# EAGLE board SparkFun_9DoF_ISM330DHCX-MMC5983MA-Panel (EAGLE 9.6.2), part 1 of 5
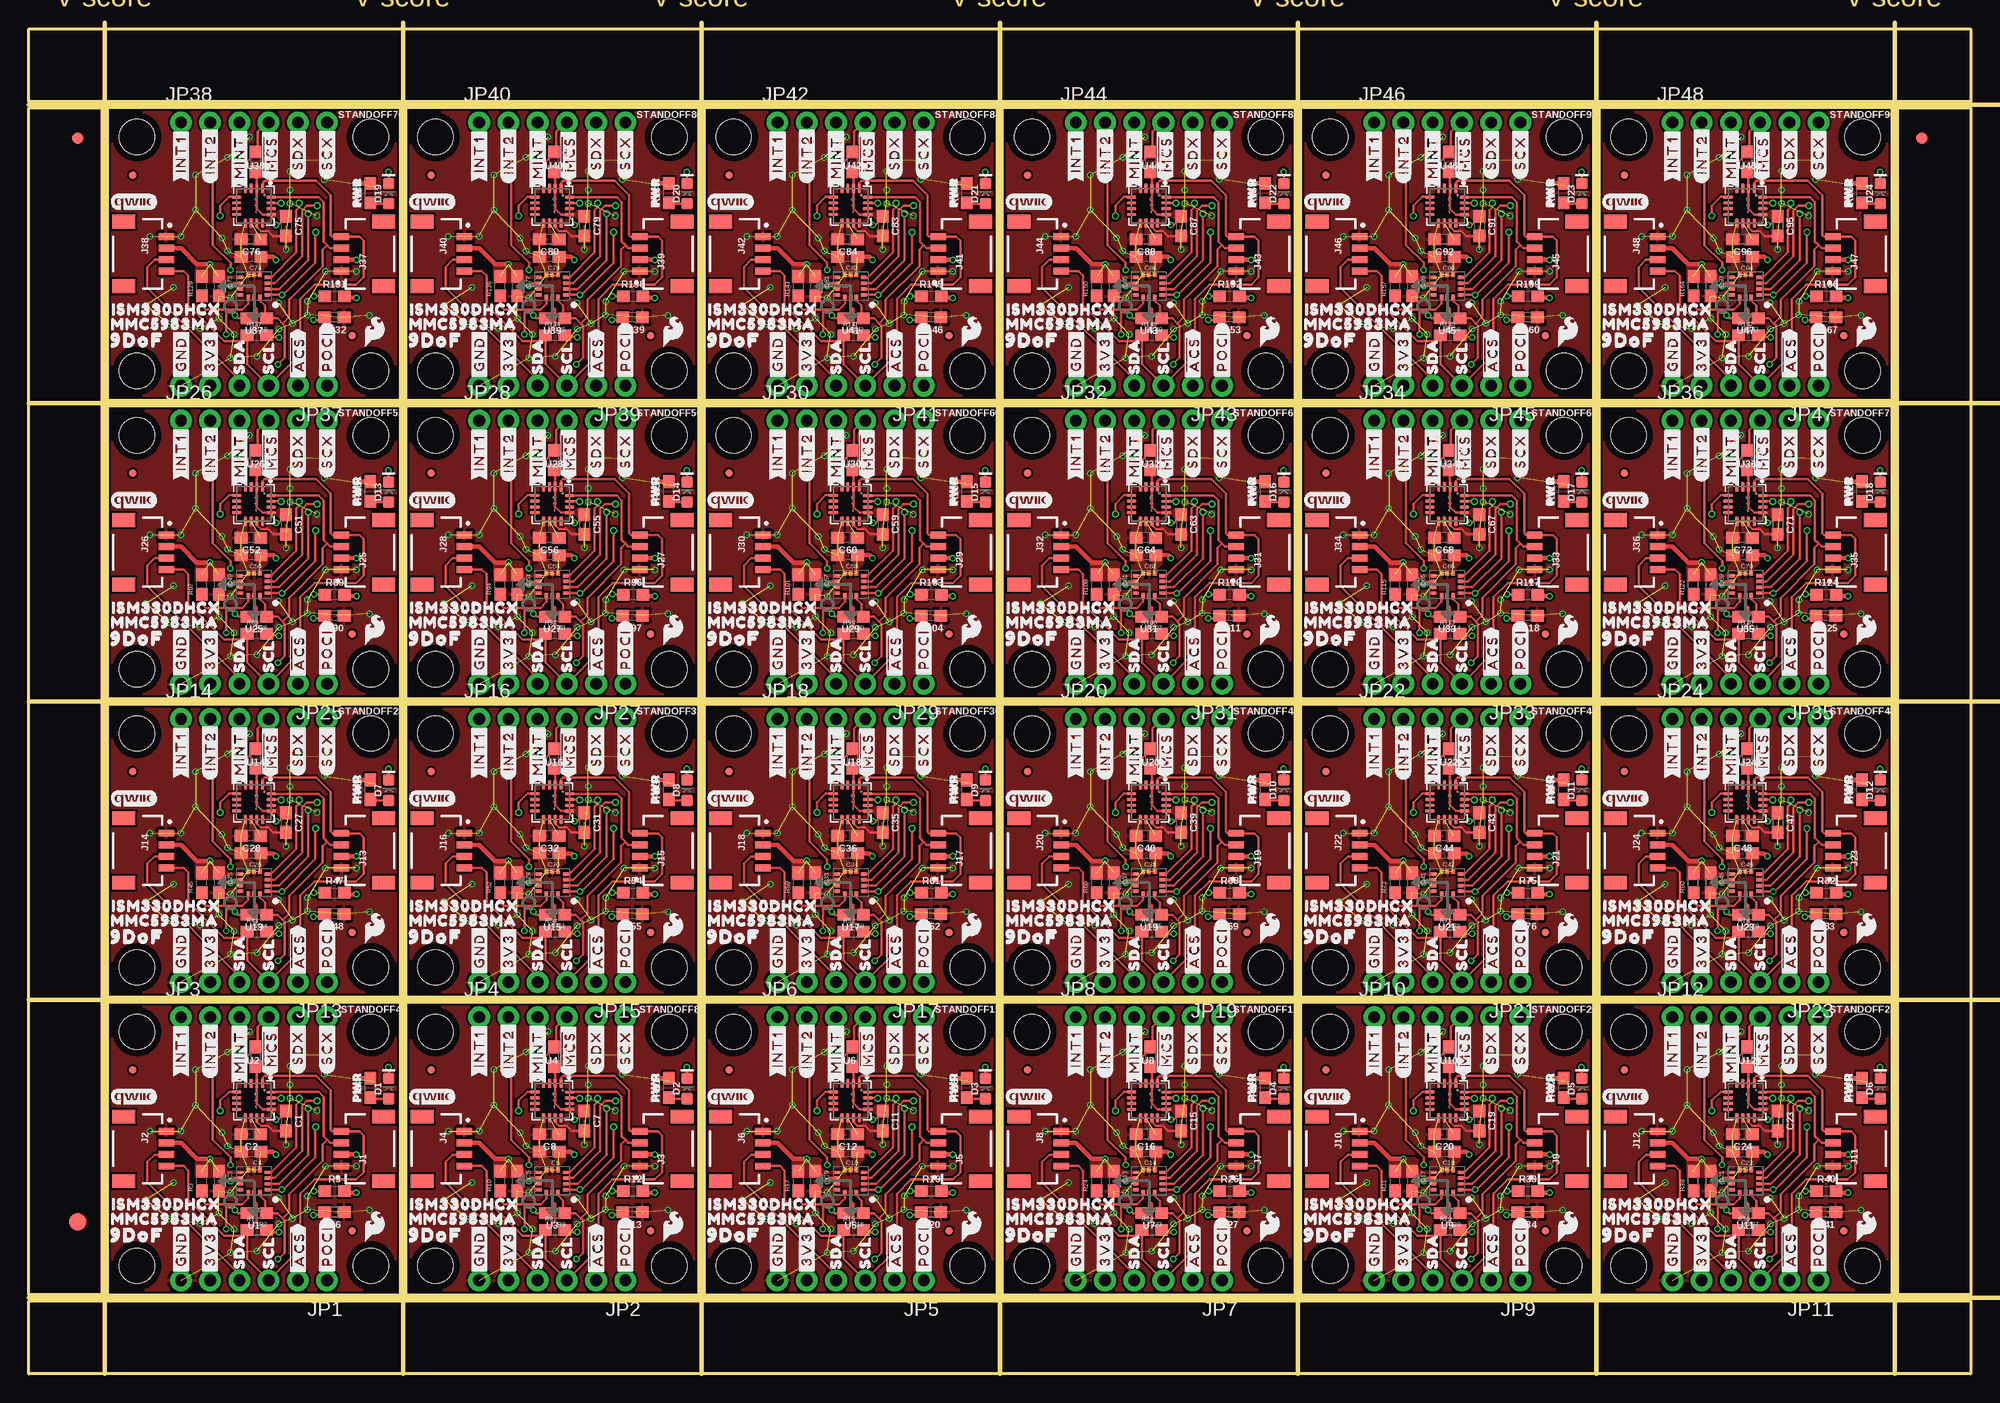
[diagram p0: board, top side]
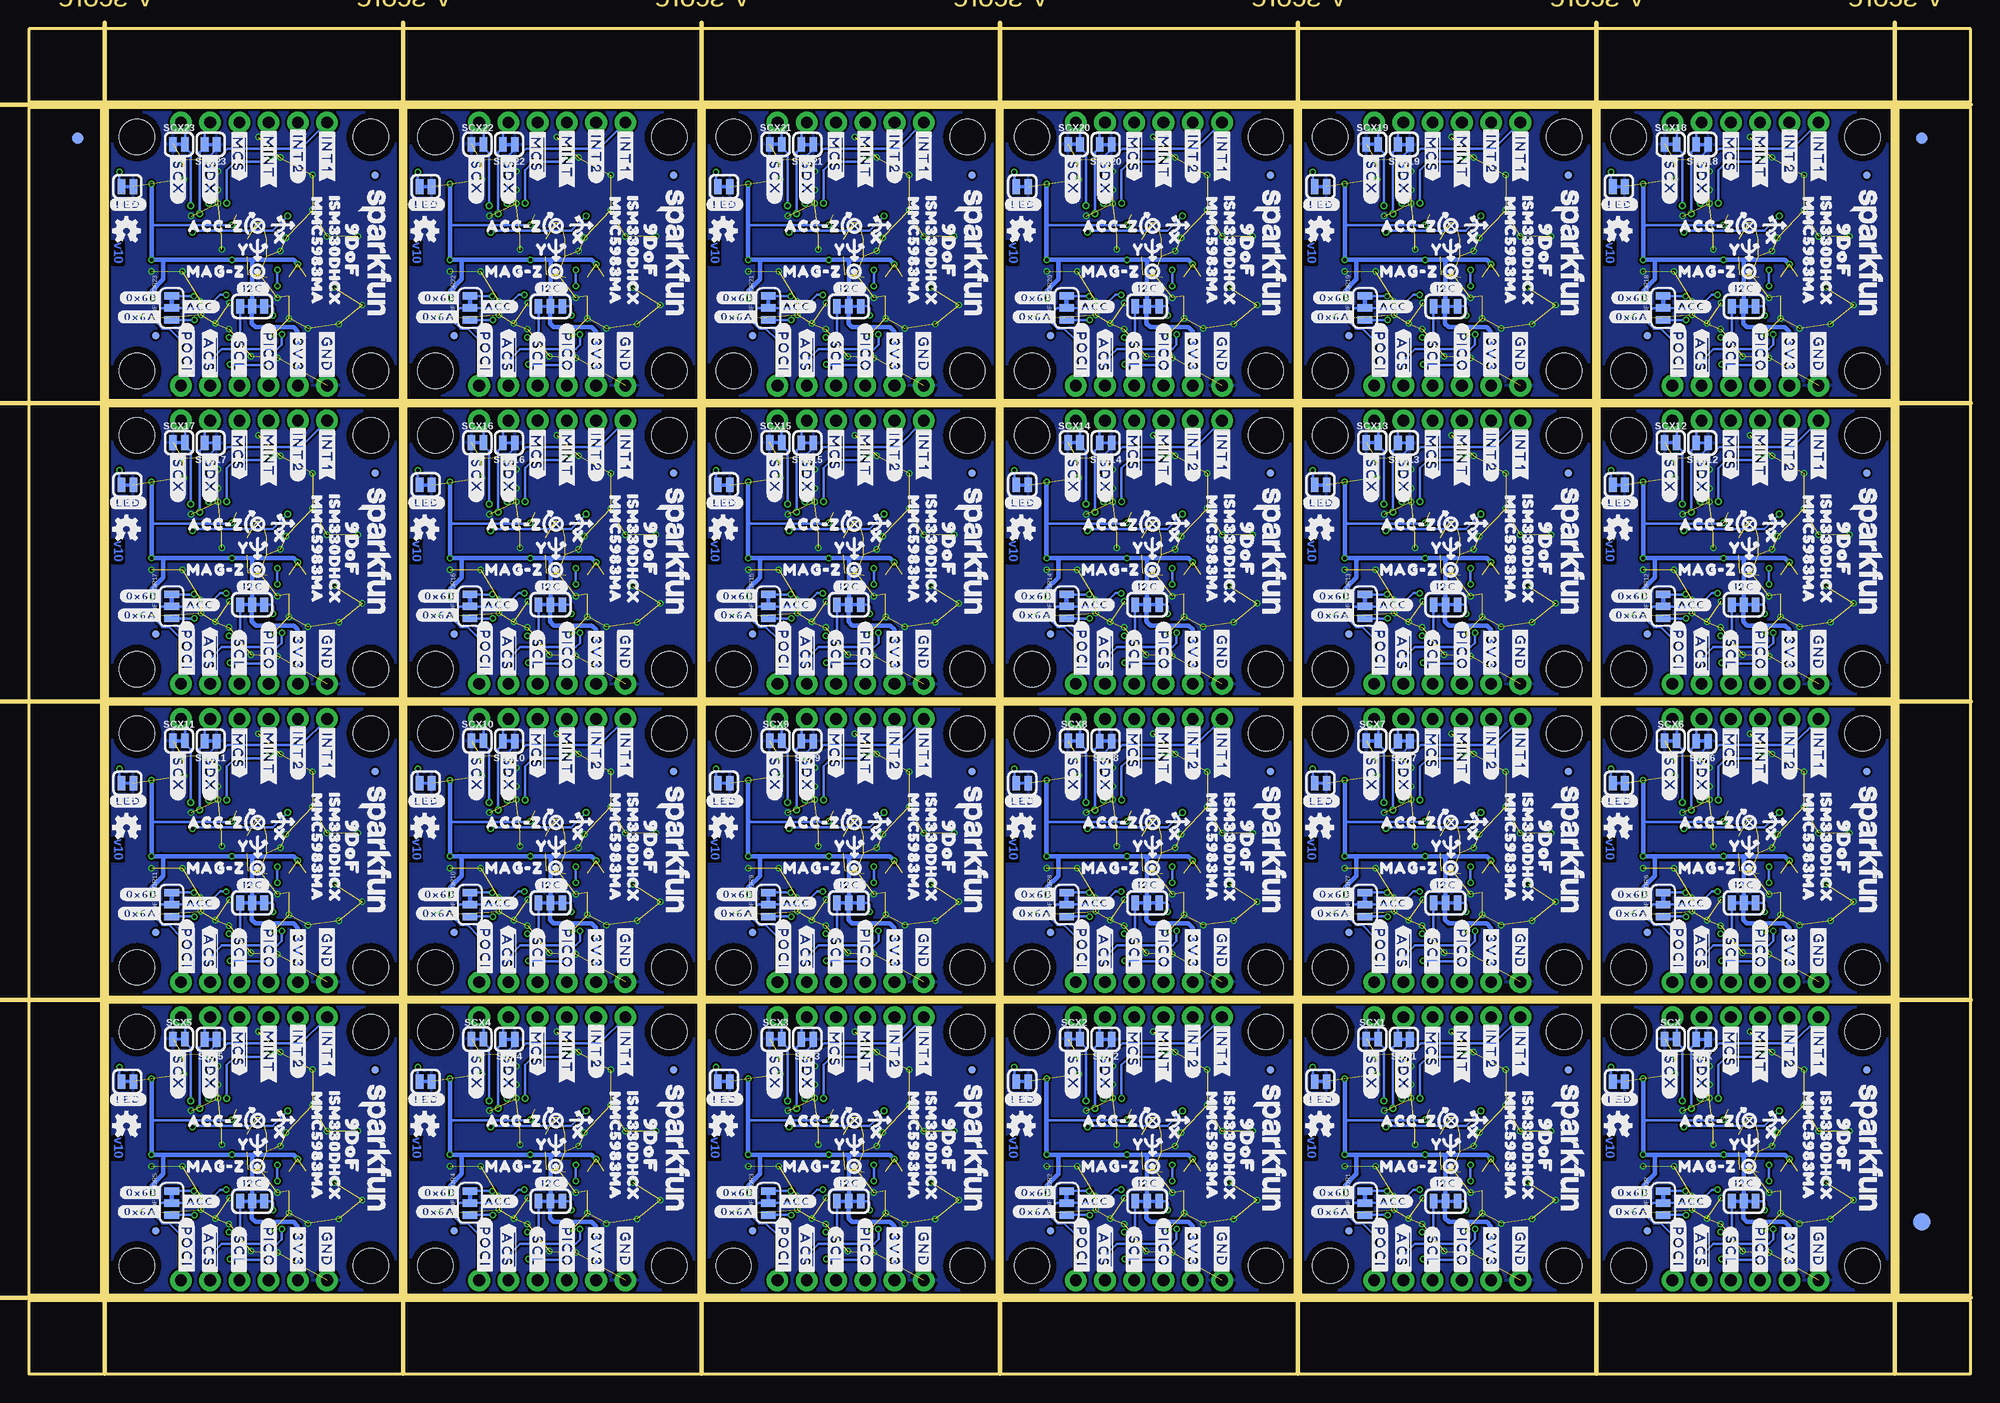
[diagram p1: board, bottom side, seen from below]

Size 168.66 x 116.84 mm. Coordinates in mm from the lower left corner, seen from the top.
Outline: 112 segments
Copper layers (1*16): Top 0.035mm / dielectric 1.5mm / Bottom 0.035mm
Design rules "SparkFun_9DoF_ISM330DHCX-MMC5983MA": minimum track width 5mil, minimum drill 0.3mm, track to track 5mil, track to pad 5mil, pad to pad 5mil, via to via 5mil, smd to smd 5mil, copper to edge 7mil, drill to drill 7mil, minimum pad ring 5mil, minimum via ring 5mil, stop-mask expansion 2.5mil, vias tented up to drill 25mil, thermal gap 10mil
tRestrict: area 19.3,17.4 to 19.4,17.7; area 19.6,22.9 to 19.9,22.9; area 18.6,22.9 to 18.9,22.9; area 18.6,22.9 to 18.9,22.9; area 18.2,22.4 to 18.5,22.5; area 45.2,17.4 to 45.3,17.7; area 45.5,22.9 to 45.8,22.9; area 44.5,22.9 to 44.8,22.9; area 44.5,22.9 to 44.8,22.9; area 44.1,22.4 to 44.4,22.5; area 71.1,17.4 to 71.2,17.7; area 71.5,22.9 to 71.8,22.9; 108 more areas
Milling: 12 lines

## Footprints (pad centres in the part's own frame; a part is rotated, then mirrored left to right if it is on the bottom)
SMT-JUMPER_3_1-NC_TRACE_SILK = smd 0.66 x 1.27: 1 -1.041,0; 2 0,0; 3 1.041,0
0603 = smd 1.1 x 1: 1 -0.85,0; 2 0.85,0
LED-0603 = smd 1 x 1: A -0.877,0; C 0.877,0
FIDUCIAL-1X2 = smd 1 x 1: 1 0,0
FIDUCIAL-1.5X3 = smd 1.5 x 1.5: 1 0,0
FIDUCIAL-MICRO = smd 0.635 x 0.635: 1 0,0
SMT-JUMPER_3_2-NC_TRACE_SILK = smd 0.66 x 1.27: 1 -1.041,0; 2 0,0; 3 1.041,0
JST04_1MM_RA = smd 0.6 x 1.35: 1 -1.5,0; 2 -0.5,0; 3 0.5,0; 4 1.5,0 | smd 1.2 x 2: NC1 2.8,-3.675; NC2 -2.8,-3.675
1X06_NO_SILK = drill 1.016 pad 1.88: 1 0,0; 2 2.54,0; 3 5.08,0; 4 7.62,0; 5 10.16,0; 6 12.7,0
SMT-JUMPER_2_NC_TRACE_SILK = smd 0.66 x 1.27: 1 -0.521,0; 2 0.521,0
STAND-OFF-TIGHT = hole 3.048: 0,0
LGA-14L = smd 0.48 x 0.3: P1 -1.163,0.75; P2 -1.163,0.25; P3 -1.163,-0.25; P4 -1.163,-0.75; P8 1.163,-0.75; P9 1.163,-0.25; P10 1.163,0.25; P11 1.163,0.75 | smd 0.3 x 0.48: P5 -0.5,-1; P6 0,-1; P7 0.5,-1; P12 0.5,1; P13 0,1; P14 -0.5,1
LGA-16-3X3MM-4X4PINS = smd 0.3 x 0.85: 1 0.754,1.498; 2 0.254,1.498; 3 -0.246,1.498; 4 -0.746,1.498; 9 -0.746,-1.506; 10 -0.246,-1.506; 11 0.254,-1.506; 12 0.754,-1.506 | smd 0.85 x 0.3: 5 -1.508,0.746; 6 -1.508,0.246; 7 -1.508,-0.254; 8 -1.508,-0.754; 13 1.496,-0.764; 14 1.496,-0.264; 15 1.496,0.236; 16 1.496,0.736

## Placement (x,y rotation side)
6DOF_ADDR  JUMPER-SMT_3_1-NC_TRACE_SILK  [SMT-JUMPER_3_1-NC_TRACE_SILK]  26.7,14.86 90 bottom
6DOF_ADDR1  JUMPER-SMT_3_1-NC_TRACE_SILK  [SMT-JUMPER_3_1-NC_TRACE_SILK]  52.61,14.86 90 bottom
6DOF_ADDR2  JUMPER-SMT_3_1-NC_TRACE_SILK  [SMT-JUMPER_3_1-NC_TRACE_SILK]  78.52,14.86 90 bottom
6DOF_ADDR3  JUMPER-SMT_3_1-NC_TRACE_SILK  [SMT-JUMPER_3_1-NC_TRACE_SILK]  104.43,14.86 90 bottom
6DOF_ADDR4  JUMPER-SMT_3_1-NC_TRACE_SILK  [SMT-JUMPER_3_1-NC_TRACE_SILK]  130.33,14.86 90 bottom
6DOF_ADDR5  JUMPER-SMT_3_1-NC_TRACE_SILK  [SMT-JUMPER_3_1-NC_TRACE_SILK]  156.24,14.86 90 bottom
6DOF_ADDR6  JUMPER-SMT_3_1-NC_TRACE_SILK  [SMT-JUMPER_3_1-NC_TRACE_SILK]  26.7,40.77 90 bottom
6DOF_ADDR7  JUMPER-SMT_3_1-NC_TRACE_SILK  [SMT-JUMPER_3_1-NC_TRACE_SILK]  52.61,40.77 90 bottom
6DOF_ADDR8  JUMPER-SMT_3_1-NC_TRACE_SILK  [SMT-JUMPER_3_1-NC_TRACE_SILK]  78.52,40.77 90 bottom
6DOF_ADDR9  JUMPER-SMT_3_1-NC_TRACE_SILK  [SMT-JUMPER_3_1-NC_TRACE_SILK]  104.43,40.77 90 bottom
6DOF_ADDR10  JUMPER-SMT_3_1-NC_TRACE_SILK  [SMT-JUMPER_3_1-NC_TRACE_SILK]  130.33,40.77 90 bottom
6DOF_ADDR11  JUMPER-SMT_3_1-NC_TRACE_SILK  [SMT-JUMPER_3_1-NC_TRACE_SILK]  156.24,40.77 90 bottom
6DOF_ADDR12  JUMPER-SMT_3_1-NC_TRACE_SILK  [SMT-JUMPER_3_1-NC_TRACE_SILK]  26.7,66.67 90 bottom
6DOF_ADDR13  JUMPER-SMT_3_1-NC_TRACE_SILK  [SMT-JUMPER_3_1-NC_TRACE_SILK]  52.61,66.67 90 bottom
6DOF_ADDR14  JUMPER-SMT_3_1-NC_TRACE_SILK  [SMT-JUMPER_3_1-NC_TRACE_SILK]  78.52,66.67 90 bottom
6DOF_ADDR15  JUMPER-SMT_3_1-NC_TRACE_SILK  [SMT-JUMPER_3_1-NC_TRACE_SILK]  104.43,66.67 90 bottom
6DOF_ADDR16  JUMPER-SMT_3_1-NC_TRACE_SILK  [SMT-JUMPER_3_1-NC_TRACE_SILK]  130.33,66.67 90 bottom
6DOF_ADDR17  JUMPER-SMT_3_1-NC_TRACE_SILK  [SMT-JUMPER_3_1-NC_TRACE_SILK]  156.24,66.67 90 bottom
6DOF_ADDR18  JUMPER-SMT_3_1-NC_TRACE_SILK  [SMT-JUMPER_3_1-NC_TRACE_SILK]  26.7,92.58 90 bottom
6DOF_ADDR19  JUMPER-SMT_3_1-NC_TRACE_SILK  [SMT-JUMPER_3_1-NC_TRACE_SILK]  52.61,92.58 90 bottom
6DOF_ADDR20  JUMPER-SMT_3_1-NC_TRACE_SILK  [SMT-JUMPER_3_1-NC_TRACE_SILK]  78.52,92.58 90 bottom
6DOF_ADDR21  JUMPER-SMT_3_1-NC_TRACE_SILK  [SMT-JUMPER_3_1-NC_TRACE_SILK]  104.43,92.58 90 bottom
6DOF_ADDR22  JUMPER-SMT_3_1-NC_TRACE_SILK  [SMT-JUMPER_3_1-NC_TRACE_SILK]  130.33,92.58 90 bottom
6DOF_ADDR23  JUMPER-SMT_3_1-NC_TRACE_SILK  [SMT-JUMPER_3_1-NC_TRACE_SILK]  156.24,92.58 90 bottom
C1  1.0uF  [0603]  22.35,21.97 270 top
C2  10uF  [0603]  19.3,20.83 180 top
C3  0.1uF  [0603]  16.51,16.76 270 top
C4  0.1uF  [0603]  19.3,19.3 180 top
C5  0.1uF  [0603]  42.42,16.76 270 top
C6  0.1uF  [0603]  45.21,19.3 180 top
C7  1.0uF  [0603]  48.26,21.97 270 top
C8  10uF  [0603]  45.21,20.83 180 top
C9  0.1uF  [0603]  68.33,16.76 270 top
C10  0.1uF  [0603]  71.12,19.3 180 top
C11  1.0uF  [0603]  74.17,21.97 270 top
C12  10uF  [0603]  71.12,20.83 180 top
C13  0.1uF  [0603]  94.23,16.76 270 top
C14  0.1uF  [0603]  97.03,19.3 180 top
C15  1.0uF  [0603]  100.08,21.97 270 top
C16  10uF  [0603]  97.03,20.83 180 top
C17  0.1uF  [0603]  120.14,16.76 270 top
C18  0.1uF  [0603]  122.94,19.3 180 top
C19  1.0uF  [0603]  125.98,21.97 270 top
C20  10uF  [0603]  122.94,20.83 180 top
C21  0.1uF  [0603]  146.05,16.76 270 top
C22  0.1uF  [0603]  148.84,19.3 180 top
C23  1.0uF  [0603]  151.89,21.97 270 top
C24  10uF  [0603]  148.84,20.83 180 top
C25  0.1uF  [0603]  16.51,42.67 270 top
C26  0.1uF  [0603]  19.3,45.21 180 top
C27  1.0uF  [0603]  22.35,47.88 270 top
C28  10uF  [0603]  19.3,46.74 180 top
C29  0.1uF  [0603]  42.42,42.67 270 top
C30  0.1uF  [0603]  45.21,45.21 180 top
C31  1.0uF  [0603]  48.26,47.88 270 top
C32  10uF  [0603]  45.21,46.74 180 top
C33  0.1uF  [0603]  68.33,42.67 270 top
C34  0.1uF  [0603]  71.12,45.21 180 top
C35  1.0uF  [0603]  74.17,47.88 270 top
C36  10uF  [0603]  71.12,46.74 180 top
C37  0.1uF  [0603]  94.23,42.67 270 top
C38  0.1uF  [0603]  97.03,45.21 180 top
C39  1.0uF  [0603]  100.08,47.88 270 top
C40  10uF  [0603]  97.03,46.74 180 top
C41  0.1uF  [0603]  120.14,42.67 270 top
C42  0.1uF  [0603]  122.94,45.21 180 top
C43  1.0uF  [0603]  125.98,47.88 270 top
C44  10uF  [0603]  122.94,46.74 180 top
C45  0.1uF  [0603]  146.05,42.67 270 top
C46  0.1uF  [0603]  148.84,45.21 180 top
C47  1.0uF  [0603]  151.89,47.88 270 top
C48  10uF  [0603]  148.84,46.74 180 top
C49  0.1uF  [0603]  16.51,68.57 270 top
C50  0.1uF  [0603]  19.3,71.12 180 top
C51  1.0uF  [0603]  22.35,73.79 270 top
C52  10uF  [0603]  19.3,72.64 180 top
C53  0.1uF  [0603]  42.42,68.57 270 top
C54  0.1uF  [0603]  45.21,71.12 180 top
C55  1.0uF  [0603]  48.26,73.79 270 top
C56  10uF  [0603]  45.21,72.64 180 top
C57  0.1uF  [0603]  68.33,68.57 270 top
C58  0.1uF  [0603]  71.12,71.12 180 top
C59  1.0uF  [0603]  74.17,73.79 270 top
C60  10uF  [0603]  71.12,72.64 180 top
C61  0.1uF  [0603]  94.23,68.57 270 top
C62  0.1uF  [0603]  97.03,71.12 180 top
C63  1.0uF  [0603]  100.08,73.79 270 top
C64  10uF  [0603]  97.03,72.64 180 top
C65  0.1uF  [0603]  120.14,68.57 270 top
C66  0.1uF  [0603]  122.94,71.12 180 top
C67  1.0uF  [0603]  125.98,73.79 270 top
C68  10uF  [0603]  122.94,72.64 180 top
C69  0.1uF  [0603]  146.05,68.57 270 top
C70  0.1uF  [0603]  148.84,71.12 180 top
C71  1.0uF  [0603]  151.89,73.79 270 top
C72  10uF  [0603]  148.84,72.64 180 top
C73  0.1uF  [0603]  16.51,94.48 270 top
C74  0.1uF  [0603]  19.3,97.03 180 top
C75  1.0uF  [0603]  22.35,99.7 270 top
C76  10uF  [0603]  19.3,98.55 180 top
C77  0.1uF  [0603]  42.42,94.48 270 top
C78  0.1uF  [0603]  45.21,97.03 180 top
C79  1.0uF  [0603]  48.26,99.7 270 top
C80  10uF  [0603]  45.21,98.55 180 top
C81  0.1uF  [0603]  68.33,94.48 270 top
C82  0.1uF  [0603]  71.12,97.03 180 top
C83  1.0uF  [0603]  74.17,99.7 270 top
C84  10uF  [0603]  71.12,98.55 180 top
C85  0.1uF  [0603]  94.23,94.48 270 top
C86  0.1uF  [0603]  97.03,97.03 180 top
C87  1.0uF  [0603]  100.08,99.7 270 top
C88  10uF  [0603]  97.03,98.55 180 top
C89  0.1uF  [0603]  120.14,94.48 270 top
C90  0.1uF  [0603]  122.94,97.03 180 top
C91  1.0uF  [0603]  125.98,99.7 270 top
C92  10uF  [0603]  122.94,98.55 180 top
C93  0.1uF  [0603]  146.05,94.48 270 top
C94  0.1uF  [0603]  148.84,97.03 180 top
C95  1.0uF  [0603]  151.89,99.7 270 top
C96  10uF  [0603]  148.84,98.55 180 top
D1  RED  [LED-0603]  31.27,24.79 90 top
D2  RED  [LED-0603]  57.18,24.79 90 top
D3  RED  [LED-0603]  83.08,24.79 90 top
D4  RED  [LED-0603]  108.99,24.79 90 top
D5  RED  [LED-0603]  134.9,24.79 90 top
D6  RED  [LED-0603]  160.81,24.79 90 top
D7  RED  [LED-0603]  31.27,50.7 90 top
D8  RED  [LED-0603]  57.18,50.7 90 top
D9  RED  [LED-0603]  83.08,50.7 90 top
D10  RED  [LED-0603]  108.99,50.7 90 top
D11  RED  [LED-0603]  134.9,50.7 90 top
D12  RED  [LED-0603]  160.81,50.7 90 top
D13  RED  [LED-0603]  31.27,76.61 90 top
D14  RED  [LED-0603]  57.18,76.61 90 top
D15  RED  [LED-0603]  83.08,76.61 90 top
D16  RED  [LED-0603]  108.99,76.61 90 top
D17  RED  [LED-0603]  134.9,76.61 90 top
D18  RED  [LED-0603]  160.81,76.61 90 top
D19  RED  [LED-0603]  31.27,102.51 90 top
D20  RED  [LED-0603]  57.18,102.51 90 top
D21  RED  [LED-0603]  83.08,102.51 90 top
D22  RED  [LED-0603]  108.99,102.51 90 top
D23  RED  [LED-0603]  134.9,102.51 90 top
D24  RED  [LED-0603]  160.81,102.51 90 top
E$1  [FIDUCIAL-1X2]  4.23,107.31 0 top
E$2  [FIDUCIAL-1X2]  4.23,107.31 0 bottom
E$3  [FIDUCIAL-1X2]  164.42,107.31 0 top
E$4  [FIDUCIAL-1X2]  164.42,107.31 0 bottom
E$5  [FIDUCIAL-1.5X3]  4.23,13.21 0 top
E$6  [FIDUCIAL-1.5X3]  4.23,13.21 0 bottom
FD1  FIDUCIALUFIDUCIAL  [FIDUCIAL-MICRO]  9.02,26.42 0 bottom
FD2  FIDUCIALUFIDUCIAL  [FIDUCIAL-MICRO]  28.09,12.45 0 bottom
FD3  FIDUCIALUFIDUCIAL  [FIDUCIAL-MICRO]  34.92,26.42 0 bottom
FD4  FIDUCIALUFIDUCIAL  [FIDUCIAL-MICRO]  54,12.45 0 bottom
FD5  FIDUCIALUFIDUCIAL  [FIDUCIAL-MICRO]  60.83,26.42 0 bottom
FD6  FIDUCIALUFIDUCIAL  [FIDUCIAL-MICRO]  79.91,12.45 0 bottom
FD7  FIDUCIALUFIDUCIAL  [FIDUCIAL-MICRO]  86.74,26.42 0 bottom
FD8  FIDUCIALUFIDUCIAL  [FIDUCIAL-MICRO]  105.82,12.45 0 bottom
FD9  FIDUCIALUFIDUCIAL  [FIDUCIAL-MICRO]  112.65,26.42 0 bottom
FD10  FIDUCIALUFIDUCIAL  [FIDUCIAL-MICRO]  131.72,12.45 0 bottom
FD11  FIDUCIALUFIDUCIAL  [FIDUCIAL-MICRO]  138.56,26.42 0 bottom
FD12  FIDUCIALUFIDUCIAL  [FIDUCIAL-MICRO]  157.63,12.45 0 bottom
FD13  FIDUCIALUFIDUCIAL  [FIDUCIAL-MICRO]  9.02,52.32 0 bottom
FD14  FIDUCIALUFIDUCIAL  [FIDUCIAL-MICRO]  28.09,38.35 0 bottom
FD15  FIDUCIALUFIDUCIAL  [FIDUCIAL-MICRO]  34.92,52.32 0 bottom
FD16  FIDUCIALUFIDUCIAL  [FIDUCIAL-MICRO]  54,38.35 0 bottom
FD17  FIDUCIALUFIDUCIAL  [FIDUCIAL-MICRO]  60.83,52.32 0 bottom
FD18  FIDUCIALUFIDUCIAL  [FIDUCIAL-MICRO]  79.91,38.35 0 bottom
FD19  FIDUCIALUFIDUCIAL  [FIDUCIAL-MICRO]  86.74,52.32 0 bottom
FD20  FIDUCIALUFIDUCIAL  [FIDUCIAL-MICRO]  105.82,38.35 0 bottom
FD21  FIDUCIALUFIDUCIAL  [FIDUCIAL-MICRO]  112.65,52.32 0 bottom
FD22  FIDUCIALUFIDUCIAL  [FIDUCIAL-MICRO]  131.72,38.35 0 bottom
FD23  FIDUCIALUFIDUCIAL  [FIDUCIAL-MICRO]  138.56,52.32 0 bottom
FD24  FIDUCIALUFIDUCIAL  [FIDUCIAL-MICRO]  157.63,38.35 0 bottom
FD25  FIDUCIALUFIDUCIAL  [FIDUCIAL-MICRO]  9.02,78.23 0 bottom
FD26  FIDUCIALUFIDUCIAL  [FIDUCIAL-MICRO]  28.09,64.26 0 bottom
FD27  FIDUCIALUFIDUCIAL  [FIDUCIAL-MICRO]  34.92,78.23 0 bottom
FD28  FIDUCIALUFIDUCIAL  [FIDUCIAL-MICRO]  54,64.26 0 bottom
FD29  FIDUCIALUFIDUCIAL  [FIDUCIAL-MICRO]  60.83,78.23 0 bottom
FD30  FIDUCIALUFIDUCIAL  [FIDUCIAL-MICRO]  79.91,64.26 0 bottom
FD31  FIDUCIALUFIDUCIAL  [FIDUCIAL-MICRO]  86.74,78.23 0 bottom
FD32  FIDUCIALUFIDUCIAL  [FIDUCIAL-MICRO]  105.82,64.26 0 bottom
FD33  FIDUCIALUFIDUCIAL  [FIDUCIAL-MICRO]  112.65,78.23 0 bottom
FD34  FIDUCIALUFIDUCIAL  [FIDUCIAL-MICRO]  131.72,64.26 0 bottom
FD35  FIDUCIALUFIDUCIAL  [FIDUCIAL-MICRO]  138.56,78.23 0 bottom
FD36  FIDUCIALUFIDUCIAL  [FIDUCIAL-MICRO]  157.63,64.26 0 bottom
FD37  FIDUCIALUFIDUCIAL  [FIDUCIAL-MICRO]  9.02,104.14 0 bottom
FD38  FIDUCIALUFIDUCIAL  [FIDUCIAL-MICRO]  28.09,90.17 0 bottom
FD39  FIDUCIALUFIDUCIAL  [FIDUCIAL-MICRO]  34.92,104.14 0 bottom
FD40  FIDUCIALUFIDUCIAL  [FIDUCIAL-MICRO]  54,90.17 0 bottom
FD41  FIDUCIALUFIDUCIAL  [FIDUCIAL-MICRO]  60.83,104.14 0 bottom
FD42  FIDUCIALUFIDUCIAL  [FIDUCIAL-MICRO]  79.91,90.17 0 bottom
FD43  FIDUCIALUFIDUCIAL  [FIDUCIAL-MICRO]  86.74,104.14 0 bottom
FD44  FIDUCIALUFIDUCIAL  [FIDUCIAL-MICRO]  105.82,90.17 0 bottom
FD45  FIDUCIALUFIDUCIAL  [FIDUCIAL-MICRO]  112.65,104.14 0 bottom
FD46  FIDUCIALUFIDUCIAL  [FIDUCIAL-MICRO]  131.72,90.17 0 bottom
FD47  FIDUCIALUFIDUCIAL  [FIDUCIAL-MICRO]  138.56,104.14 0 bottom
FD48  FIDUCIALUFIDUCIAL  [FIDUCIAL-MICRO]  157.63,90.17 0 bottom
FID1  FIDUCIALUFIDUCIAL  [FIDUCIAL-MICRO]  9.02,26.42 0 top
FID2  FIDUCIALUFIDUCIAL  [FIDUCIAL-MICRO]  28.09,12.45 0 top
FID3  FIDUCIALUFIDUCIAL  [FIDUCIAL-MICRO]  34.92,26.42 0 top
FID4  FIDUCIALUFIDUCIAL  [FIDUCIAL-MICRO]  54,12.45 0 top
FID5  FIDUCIALUFIDUCIAL  [FIDUCIAL-MICRO]  60.83,26.42 0 top
FID6  FIDUCIALUFIDUCIAL  [FIDUCIAL-MICRO]  79.91,12.45 0 top
FID7  FIDUCIALUFIDUCIAL  [FIDUCIAL-MICRO]  86.74,26.42 0 top
FID8  FIDUCIALUFIDUCIAL  [FIDUCIAL-MICRO]  105.82,12.45 0 top
FID9  FIDUCIALUFIDUCIAL  [FIDUCIAL-MICRO]  112.65,26.42 0 top
FID10  FIDUCIALUFIDUCIAL  [FIDUCIAL-MICRO]  131.72,12.45 0 top
FID11  FIDUCIALUFIDUCIAL  [FIDUCIAL-MICRO]  138.56,26.42 0 top
FID12  FIDUCIALUFIDUCIAL  [FIDUCIAL-MICRO]  157.63,12.45 0 top
FID13  FIDUCIALUFIDUCIAL  [FIDUCIAL-MICRO]  9.02,52.32 0 top
FID14  FIDUCIALUFIDUCIAL  [FIDUCIAL-MICRO]  28.09,38.35 0 top
FID15  FIDUCIALUFIDUCIAL  [FIDUCIAL-MICRO]  34.92,52.32 0 top
FID16  FIDUCIALUFIDUCIAL  [FIDUCIAL-MICRO]  54,38.35 0 top
FID17  FIDUCIALUFIDUCIAL  [FIDUCIAL-MICRO]  60.83,52.32 0 top
FID18  FIDUCIALUFIDUCIAL  [FIDUCIAL-MICRO]  79.91,38.35 0 top
FID19  FIDUCIALUFIDUCIAL  [FIDUCIAL-MICRO]  86.74,52.32 0 top
FID20  FIDUCIALUFIDUCIAL  [FIDUCIAL-MICRO]  105.82,38.35 0 top
FID21  FIDUCIALUFIDUCIAL  [FIDUCIAL-MICRO]  112.65,52.32 0 top
FID22  FIDUCIALUFIDUCIAL  [FIDUCIAL-MICRO]  131.72,38.35 0 top
FID23  FIDUCIALUFIDUCIAL  [FIDUCIAL-MICRO]  138.56,52.32 0 top
FID24  FIDUCIALUFIDUCIAL  [FIDUCIAL-MICRO]  157.63,38.35 0 top
FID25  FIDUCIALUFIDUCIAL  [FIDUCIAL-MICRO]  9.02,78.23 0 top
FID26  FIDUCIALUFIDUCIAL  [FIDUCIAL-MICRO]  28.09,64.26 0 top
FID27  FIDUCIALUFIDUCIAL  [FIDUCIAL-MICRO]  34.92,78.23 0 top
FID28  FIDUCIALUFIDUCIAL  [FIDUCIAL-MICRO]  54,64.26 0 top
FID29  FIDUCIALUFIDUCIAL  [FIDUCIAL-MICRO]  60.83,78.23 0 top
FID30  FIDUCIALUFIDUCIAL  [FIDUCIAL-MICRO]  79.91,64.26 0 top
FID31  FIDUCIALUFIDUCIAL  [FIDUCIAL-MICRO]  86.74,78.23 0 top
FID32  FIDUCIALUFIDUCIAL  [FIDUCIAL-MICRO]  105.82,64.26 0 top
FID33  FIDUCIALUFIDUCIAL  [FIDUCIAL-MICRO]  112.65,78.23 0 top
FID34  FIDUCIALUFIDUCIAL  [FIDUCIAL-MICRO]  131.72,64.26 0 top
FID35  FIDUCIALUFIDUCIAL  [FIDUCIAL-MICRO]  138.56,78.23 0 top
FID36  FIDUCIALUFIDUCIAL  [FIDUCIAL-MICRO]  157.63,64.26 0 top
FID37  FIDUCIALUFIDUCIAL  [FIDUCIAL-MICRO]  9.02,104.14 0 top
FID38  FIDUCIALUFIDUCIAL  [FIDUCIAL-MICRO]  28.09,90.17 0 top
FID39  FIDUCIALUFIDUCIAL  [FIDUCIAL-MICRO]  34.92,104.14 0 top
FID40  FIDUCIALUFIDUCIAL  [FIDUCIAL-MICRO]  54,90.17 0 top
FID41  FIDUCIALUFIDUCIAL  [FIDUCIAL-MICRO]  60.83,104.14 0 top
FID42  FIDUCIALUFIDUCIAL  [FIDUCIAL-MICRO]  79.91,90.17 0 top
FID43  FIDUCIALUFIDUCIAL  [FIDUCIAL-MICRO]  86.74,104.14 0 top
FID44  FIDUCIALUFIDUCIAL  [FIDUCIAL-MICRO]  105.82,90.17 0 top
FID45  FIDUCIALUFIDUCIAL  [FIDUCIAL-MICRO]  112.65,104.14 0 top
FID46  FIDUCIALUFIDUCIAL  [FIDUCIAL-MICRO]  131.72,90.17 0 top
FID47  FIDUCIALUFIDUCIAL  [FIDUCIAL-MICRO]  138.56,104.14 0 top
FID48  FIDUCIALUFIDUCIAL  [FIDUCIAL-MICRO]  157.63,90.17 0 top
I2C_PU  S_MODE  [SMT-JUMPER_3_2-NC_TRACE_SILK]  19.71,15.01 0 bottom
I2C_PU1  S_MODE  [SMT-JUMPER_3_2-NC_TRACE_SILK]  45.62,15.01 0 bottom
I2C_PU2  S_MODE  [SMT-JUMPER_3_2-NC_TRACE_SILK]  71.53,15.01 0 bottom
I2C_PU3  S_MODE  [SMT-JUMPER_3_2-NC_TRACE_SILK]  97.43,15.01 0 bottom
I2C_PU4  S_MODE  [SMT-JUMPER_3_2-NC_TRACE_SILK]  123.34,15.01 0 bottom
I2C_PU5  S_MODE  [SMT-JUMPER_3_2-NC_TRACE_SILK]  149.25,15.01 0 bottom
I2C_PU6  S_MODE  [SMT-JUMPER_3_2-NC_TRACE_SILK]  19.71,40.91 0 bottom
I2C_PU7  S_MODE  [SMT-JUMPER_3_2-NC_TRACE_SILK]  45.62,40.91 0 bottom
I2C_PU8  S_MODE  [SMT-JUMPER_3_2-NC_TRACE_SILK]  71.53,40.91 0 bottom
I2C_PU9  S_MODE  [SMT-JUMPER_3_2-NC_TRACE_SILK]  97.43,40.91 0 bottom
I2C_PU10  S_MODE  [SMT-JUMPER_3_2-NC_TRACE_SILK]  123.34,40.91 0 bottom
I2C_PU11  S_MODE  [SMT-JUMPER_3_2-NC_TRACE_SILK]  149.25,40.91 0 bottom
I2C_PU12  S_MODE  [SMT-JUMPER_3_2-NC_TRACE_SILK]  19.71,66.82 0 bottom
I2C_PU13  S_MODE  [SMT-JUMPER_3_2-NC_TRACE_SILK]  45.62,66.82 0 bottom
I2C_PU14  S_MODE  [SMT-JUMPER_3_2-NC_TRACE_SILK]  71.53,66.82 0 bottom
I2C_PU15  S_MODE  [SMT-JUMPER_3_2-NC_TRACE_SILK]  97.43,66.82 0 bottom
I2C_PU16  S_MODE  [SMT-JUMPER_3_2-NC_TRACE_SILK]  123.34,66.82 0 bottom
I2C_PU17  S_MODE  [SMT-JUMPER_3_2-NC_TRACE_SILK]  149.25,66.82 0 bottom
I2C_PU18  S_MODE  [SMT-JUMPER_3_2-NC_TRACE_SILK]  19.71,92.73 0 bottom
I2C_PU19  S_MODE  [SMT-JUMPER_3_2-NC_TRACE_SILK]  45.62,92.73 0 bottom
I2C_PU20  S_MODE  [SMT-JUMPER_3_2-NC_TRACE_SILK]  71.53,92.73 0 bottom
I2C_PU21  S_MODE  [SMT-JUMPER_3_2-NC_TRACE_SILK]  97.43,92.73 0 bottom
I2C_PU22  S_MODE  [SMT-JUMPER_3_2-NC_TRACE_SILK]  123.34,92.73 0 bottom
I2C_PU23  S_MODE  [SMT-JUMPER_3_2-NC_TRACE_SILK]  149.25,92.73 0 bottom
J1  QWIIC_RIGHT_ANGLE  [JST04_1MM_RA]  27.15,19.56 90 top
J2  QWIIC_RIGHT_ANGLE  [JST04_1MM_RA]  11.94,19.56 270 top
J3  QWIIC_RIGHT_ANGLE  [JST04_1MM_RA]  53.06,19.56 90 top
J4  QWIIC_RIGHT_ANGLE  [JST04_1MM_RA]  37.85,19.56 270 top
J5  QWIIC_RIGHT_ANGLE  [JST04_1MM_RA]  78.97,19.56 90 top
J6  QWIIC_RIGHT_ANGLE  [JST04_1MM_RA]  63.75,19.56 270 top
J7  QWIIC_RIGHT_ANGLE  [JST04_1MM_RA]  104.88,19.56 90 top
J8  QWIIC_RIGHT_ANGLE  [JST04_1MM_RA]  89.66,19.56 270 top
J9  QWIIC_RIGHT_ANGLE  [JST04_1MM_RA]  130.78,19.56 90 top
J10  QWIIC_RIGHT_ANGLE  [JST04_1MM_RA]  115.57,19.56 270 top
J11  QWIIC_RIGHT_ANGLE  [JST04_1MM_RA]  156.69,19.56 90 top
J12  QWIIC_RIGHT_ANGLE  [JST04_1MM_RA]  141.48,19.56 270 top
J13  QWIIC_RIGHT_ANGLE  [JST04_1MM_RA]  27.15,45.47 90 top
J14  QWIIC_RIGHT_ANGLE  [JST04_1MM_RA]  11.94,45.47 270 top
J15  QWIIC_RIGHT_ANGLE  [JST04_1MM_RA]  53.06,45.47 90 top
J16  QWIIC_RIGHT_ANGLE  [JST04_1MM_RA]  37.85,45.47 270 top
J17  QWIIC_RIGHT_ANGLE  [JST04_1MM_RA]  78.97,45.47 90 top
J18  QWIIC_RIGHT_ANGLE  [JST04_1MM_RA]  63.75,45.47 270 top
J19  QWIIC_RIGHT_ANGLE  [JST04_1MM_RA]  104.88,45.47 90 top
J20  QWIIC_RIGHT_ANGLE  [JST04_1MM_RA]  89.66,45.47 270 top
J21  QWIIC_RIGHT_ANGLE  [JST04_1MM_RA]  130.78,45.47 90 top
J22  QWIIC_RIGHT_ANGLE  [JST04_1MM_RA]  115.57,45.47 270 top
J23  QWIIC_RIGHT_ANGLE  [JST04_1MM_RA]  156.69,45.47 90 top
J24  QWIIC_RIGHT_ANGLE  [JST04_1MM_RA]  141.48,45.47 270 top
J25  QWIIC_RIGHT_ANGLE  [JST04_1MM_RA]  27.15,71.37 90 top
J26  QWIIC_RIGHT_ANGLE  [JST04_1MM_RA]  11.94,71.37 270 top
J27  QWIIC_RIGHT_ANGLE  [JST04_1MM_RA]  53.06,71.37 90 top
J28  QWIIC_RIGHT_ANGLE  [JST04_1MM_RA]  37.85,71.37 270 top
J29  QWIIC_RIGHT_ANGLE  [JST04_1MM_RA]  78.97,71.37 90 top
J30  QWIIC_RIGHT_ANGLE  [JST04_1MM_RA]  63.75,71.37 270 top
J31  QWIIC_RIGHT_ANGLE  [JST04_1MM_RA]  104.88,71.37 90 top
J32  QWIIC_RIGHT_ANGLE  [JST04_1MM_RA]  89.66,71.37 270 top
J33  QWIIC_RIGHT_ANGLE  [JST04_1MM_RA]  130.78,71.37 90 top
J34  QWIIC_RIGHT_ANGLE  [JST04_1MM_RA]  115.57,71.37 270 top
J35  QWIIC_RIGHT_ANGLE  [JST04_1MM_RA]  156.69,71.37 90 top
J36  QWIIC_RIGHT_ANGLE  [JST04_1MM_RA]  141.48,71.37 270 top
J37  QWIIC_RIGHT_ANGLE  [JST04_1MM_RA]  27.15,97.28 90 top
J38  QWIIC_RIGHT_ANGLE  [JST04_1MM_RA]  11.94,97.28 270 top
J39  QWIIC_RIGHT_ANGLE  [JST04_1MM_RA]  53.06,97.28 90 top
J40  QWIIC_RIGHT_ANGLE  [JST04_1MM_RA]  37.85,97.28 270 top
J41  QWIIC_RIGHT_ANGLE  [JST04_1MM_RA]  78.97,97.28 90 top
J42  QWIIC_RIGHT_ANGLE  [JST04_1MM_RA]  63.75,97.28 270 top
J43  QWIIC_RIGHT_ANGLE  [JST04_1MM_RA]  104.88,97.28 90 top
J44  QWIIC_RIGHT_ANGLE  [JST04_1MM_RA]  89.66,97.28 270 top
J45  QWIIC_RIGHT_ANGLE  [JST04_1MM_RA]  130.78,97.28 90 top
J46  QWIIC_RIGHT_ANGLE  [JST04_1MM_RA]  115.57,97.28 270 top
J47  QWIIC_RIGHT_ANGLE  [JST04_1MM_RA]  156.69,97.28 90 top
J48  QWIIC_RIGHT_ANGLE  [JST04_1MM_RA]  141.48,97.28 270 top
JP1  IO  [1X06_NO_SILK]  25.91,8.13 180 top
JP2  IO  [1X06_NO_SILK]  51.82,8.13 180 top
JP3  IO  [1X06_NO_SILK]  13.21,30.99 0 top
JP4  IO  [1X06_NO_SILK]  39.12,30.99 0 top
JP5  IO  [1X06_NO_SILK]  77.72,8.13 180 top
JP6  IO  [1X06_NO_SILK]  65.02,30.99 0 top
JP7  IO  [1X06_NO_SILK]  103.63,8.13 180 top
JP8  IO  [1X06_NO_SILK]  90.93,30.99 0 top
JP9  IO  [1X06_NO_SILK]  129.54,8.13 180 top
JP10  IO  [1X06_NO_SILK]  116.84,30.99 0 top
JP11  IO  [1X06_NO_SILK]  155.45,8.13 180 top
JP12  IO  [1X06_NO_SILK]  142.75,30.99 0 top
JP13  IO  [1X06_NO_SILK]  25.91,34.04 180 top
JP14  IO  [1X06_NO_SILK]  13.21,56.9 0 top
JP15  IO  [1X06_NO_SILK]  51.82,34.04 180 top
JP16  IO  [1X06_NO_SILK]  39.12,56.9 0 top
JP17  IO  [1X06_NO_SILK]  77.72,34.04 180 top
JP18  IO  [1X06_NO_SILK]  65.02,56.9 0 top
JP19  IO  [1X06_NO_SILK]  103.63,34.04 180 top
JP20  IO  [1X06_NO_SILK]  90.93,56.9 0 top
JP21  IO  [1X06_NO_SILK]  129.54,34.04 180 top
JP22  IO  [1X06_NO_SILK]  116.84,56.9 0 top
JP23  IO  [1X06_NO_SILK]  155.45,34.04 180 top
JP24  IO  [1X06_NO_SILK]  142.75,56.9 0 top
JP25  IO  [1X06_NO_SILK]  25.91,59.94 180 top
JP26  IO  [1X06_NO_SILK]  13.21,82.8 0 top
JP27  IO  [1X06_NO_SILK]  51.82,59.94 180 top
JP28  IO  [1X06_NO_SILK]  39.12,82.8 0 top
JP29  IO  [1X06_NO_SILK]  77.72,59.94 180 top
JP30  IO  [1X06_NO_SILK]  65.02,82.8 0 top
JP31  IO  [1X06_NO_SILK]  103.63,59.94 180 top
JP32  IO  [1X06_NO_SILK]  90.93,82.8 0 top
JP33  IO  [1X06_NO_SILK]  129.54,59.94 180 top
JP34  IO  [1X06_NO_SILK]  116.84,82.8 0 top
JP35  IO  [1X06_NO_SILK]  155.45,59.94 180 top
JP36  IO  [1X06_NO_SILK]  142.75,82.8 0 top
JP37  IO  [1X06_NO_SILK]  25.91,85.85 180 top
JP38  IO  [1X06_NO_SILK]  13.21,108.71 0 top
JP39  IO  [1X06_NO_SILK]  51.82,85.85 180 top
JP40  IO  [1X06_NO_SILK]  39.12,108.71 0 top
JP41  IO  [1X06_NO_SILK]  77.72,85.85 180 top
JP42  IO  [1X06_NO_SILK]  65.02,108.71 0 top
JP43  IO  [1X06_NO_SILK]  103.63,85.85 180 top
JP44  IO  [1X06_NO_SILK]  90.93,108.71 0 top
JP45  IO  [1X06_NO_SILK]  129.54,85.85 180 top
JP46  IO  [1X06_NO_SILK]  116.84,108.71 0 top
JP47  IO  [1X06_NO_SILK]  155.45,85.85 180 top
JP48  IO  [1X06_NO_SILK]  142.75,108.71 0 top
LED  JUMPER-SMT_2_NC_TRACE_SILK  [SMT-JUMPER_2_NC_TRACE_SILK]  30.56,25.4 180 bottom
LED1  JUMPER-SMT_2_NC_TRACE_SILK  [SMT-JUMPER_2_NC_TRACE_SILK]  56.46,25.4 180 bottom
LED2  JUMPER-SMT_2_NC_TRACE_SILK  [SMT-JUMPER_2_NC_TRACE_SILK]  82.37,25.4 180 bottom
LED3  JUMPER-SMT_2_NC_TRACE_SILK  [SMT-JUMPER_2_NC_TRACE_SILK]  108.28,25.4 180 bottom
LED4  JUMPER-SMT_2_NC_TRACE_SILK  [SMT-JUMPER_2_NC_TRACE_SILK]  134.19,25.4 180 bottom
LED5  JUMPER-SMT_2_NC_TRACE_SILK  [SMT-JUMPER_2_NC_TRACE_SILK]  160.1,25.4 180 bottom
LED6  JUMPER-SMT_2_NC_TRACE_SILK  [SMT-JUMPER_2_NC_TRACE_SILK]  30.56,51.31 180 bottom
LED7  JUMPER-SMT_2_NC_TRACE_SILK  [SMT-JUMPER_2_NC_TRACE_SILK]  56.46,51.31 180 bottom
LED8  JUMPER-SMT_2_NC_TRACE_SILK  [SMT-JUMPER_2_NC_TRACE_SILK]  82.37,51.31 180 bottom
LED9  JUMPER-SMT_2_NC_TRACE_SILK  [SMT-JUMPER_2_NC_TRACE_SILK]  108.28,51.31 180 bottom
LED10  JUMPER-SMT_2_NC_TRACE_SILK  [SMT-JUMPER_2_NC_TRACE_SILK]  134.19,51.31 180 bottom
LED11  JUMPER-SMT_2_NC_TRACE_SILK  [SMT-JUMPER_2_NC_TRACE_SILK]  160.1,51.31 180 bottom
LED12  JUMPER-SMT_2_NC_TRACE_SILK  [SMT-JUMPER_2_NC_TRACE_SILK]  30.56,77.22 180 bottom
LED13  JUMPER-SMT_2_NC_TRACE_SILK  [SMT-JUMPER_2_NC_TRACE_SILK]  56.46,77.22 180 bottom
LED14  JUMPER-SMT_2_NC_TRACE_SILK  [SMT-JUMPER_2_NC_TRACE_SILK]  82.37,77.22 180 bottom
LED15  JUMPER-SMT_2_NC_TRACE_SILK  [SMT-JUMPER_2_NC_TRACE_SILK]  108.28,77.22 180 bottom
LED16  JUMPER-SMT_2_NC_TRACE_SILK  [SMT-JUMPER_2_NC_TRACE_SILK]  134.19,77.22 180 bottom
LED17  JUMPER-SMT_2_NC_TRACE_SILK  [SMT-JUMPER_2_NC_TRACE_SILK]  160.1,77.22 180 bottom
LED18  JUMPER-SMT_2_NC_TRACE_SILK  [SMT-JUMPER_2_NC_TRACE_SILK]  30.56,103.12 180 bottom
LED19  JUMPER-SMT_2_NC_TRACE_SILK  [SMT-JUMPER_2_NC_TRACE_SILK]  56.46,103.12 180 bottom
LED20  JUMPER-SMT_2_NC_TRACE_SILK  [SMT-JUMPER_2_NC_TRACE_SILK]  82.37,103.12 180 bottom
LED21  JUMPER-SMT_2_NC_TRACE_SILK  [SMT-JUMPER_2_NC_TRACE_SILK]  108.28,103.12 180 bottom
LED22  JUMPER-SMT_2_NC_TRACE_SILK  [SMT-JUMPER_2_NC_TRACE_SILK]  134.19,103.12 180 bottom
LED23  JUMPER-SMT_2_NC_TRACE_SILK  [SMT-JUMPER_2_NC_TRACE_SILK]  160.1,103.12 180 bottom
LOGO1  QWIIC_LOGO_4MM  [QWIIC_4MM]  9.14,24.08 0 top
LOGO2  OSHW-LOGOMINI  [OSHW-LOGO-MINI]  30.63,21.57 0 bottom
LOGO3  SFE_LOGO_NAME.1_INCH  [SFE_LOGO_NAME_.1]  9.07,19.64 270 bottom
LOGO4  OSHW-LOGOMINI  [OSHW-LOGO-MINI]  56.54,21.57 0 bottom
LOGO5  SFE_LOGO_NAME.1_INCH  [SFE_LOGO_NAME_.1]  34.98,19.64 270 bottom
LOGO6  QWIIC_LOGO_4MM  [QWIIC_4MM]  35.05,24.08 0 top
LOGO7  OSHW-LOGOMINI  [OSHW-LOGO-MINI]  82.45,21.57 0 bottom
LOGO8  SFE_LOGO_NAME.1_INCH  [SFE_LOGO_NAME_.1]  60.89,19.64 270 bottom
LOGO9  QWIIC_LOGO_4MM  [QWIIC_4MM]  60.96,24.08 0 top
LOGO10  OSHW-LOGOMINI  [OSHW-LOGO-MINI]  108.36,21.57 0 bottom
LOGO11  SFE_LOGO_NAME.1_INCH  [SFE_LOGO_NAME_.1]  86.79,19.64 270 bottom
LOGO12  QWIIC_LOGO_4MM  [QWIIC_4MM]  86.87,24.08 0 top
LOGO13  OSHW-LOGOMINI  [OSHW-LOGO-MINI]  134.26,21.57 0 bottom
LOGO14  SFE_LOGO_NAME.1_INCH  [SFE_LOGO_NAME_.1]  112.7,19.64 270 bottom
LOGO15  QWIIC_LOGO_4MM  [QWIIC_4MM]  112.78,24.08 0 top
LOGO16  OSHW-LOGOMINI  [OSHW-LOGO-MINI]  160.17,21.57 0 bottom
LOGO17  SFE_LOGO_NAME.1_INCH  [SFE_LOGO_NAME_.1]  138.61,19.64 270 bottom
LOGO18  QWIIC_LOGO_4MM  [QWIIC_4MM]  138.68,24.08 0 top
LOGO19  OSHW-LOGOMINI  [OSHW-LOGO-MINI]  30.63,47.48 0 bottom
LOGO20  SFE_LOGO_NAME.1_INCH  [SFE_LOGO_NAME_.1]  9.07,45.55 270 bottom
LOGO21  QWIIC_LOGO_4MM  [QWIIC_4MM]  9.14,49.99 0 top
LOGO22  OSHW-LOGOMINI  [OSHW-LOGO-MINI]  56.54,47.48 0 bottom
LOGO23  SFE_LOGO_NAME.1_INCH  [SFE_LOGO_NAME_.1]  34.98,45.55 270 bottom
LOGO24  QWIIC_LOGO_4MM  [QWIIC_4MM]  35.05,49.99 0 top
LOGO25  OSHW-LOGOMINI  [OSHW-LOGO-MINI]  82.45,47.48 0 bottom
LOGO26  SFE_LOGO_NAME.1_INCH  [SFE_LOGO_NAME_.1]  60.89,45.55 270 bottom
LOGO27  QWIIC_LOGO_4MM  [QWIIC_4MM]  60.96,49.99 0 top
LOGO28  OSHW-LOGOMINI  [OSHW-LOGO-MINI]  108.36,47.48 0 bottom
LOGO29  SFE_LOGO_NAME.1_INCH  [SFE_LOGO_NAME_.1]  86.79,45.55 270 bottom
LOGO30  QWIIC_LOGO_4MM  [QWIIC_4MM]  86.87,49.99 0 top
LOGO31  OSHW-LOGOMINI  [OSHW-LOGO-MINI]  134.26,47.48 0 bottom
LOGO32  SFE_LOGO_NAME.1_INCH  [SFE_LOGO_NAME_.1]  112.7,45.55 270 bottom
LOGO33  QWIIC_LOGO_4MM  [QWIIC_4MM]  112.78,49.99 0 top
LOGO34  OSHW-LOGOMINI  [OSHW-LOGO-MINI]  160.17,47.48 0 bottom
LOGO35  SFE_LOGO_NAME.1_INCH  [SFE_LOGO_NAME_.1]  138.61,45.55 270 bottom
LOGO36  QWIIC_LOGO_4MM  [QWIIC_4MM]  138.68,49.99 0 top
LOGO37  OSHW-LOGOMINI  [OSHW-LOGO-MINI]  30.63,73.39 0 bottom
LOGO38  SFE_LOGO_NAME.1_INCH  [SFE_LOGO_NAME_.1]  9.07,71.46 270 bottom
LOGO39  QWIIC_LOGO_4MM  [QWIIC_4MM]  9.14,75.9 0 top
LOGO40  OSHW-LOGOMINI  [OSHW-LOGO-MINI]  56.54,73.39 0 bottom
LOGO41  SFE_LOGO_NAME.1_INCH  [SFE_LOGO_NAME_.1]  34.98,71.46 270 bottom
LOGO42  QWIIC_LOGO_4MM  [QWIIC_4MM]  35.05,75.9 0 top
LOGO43  OSHW-LOGOMINI  [OSHW-LOGO-MINI]  82.45,73.39 0 bottom
LOGO44  SFE_LOGO_NAME.1_INCH  [SFE_LOGO_NAME_.1]  60.89,71.46 270 bottom
LOGO45  QWIIC_LOGO_4MM  [QWIIC_4MM]  60.96,75.9 0 top
LOGO46  OSHW-LOGOMINI  [OSHW-LOGO-MINI]  108.36,73.39 0 bottom
LOGO47  SFE_LOGO_NAME.1_INCH  [SFE_LOGO_NAME_.1]  86.79,71.46 270 bottom
LOGO48  QWIIC_LOGO_4MM  [QWIIC_4MM]  86.87,75.9 0 top
LOGO49  OSHW-LOGOMINI  [OSHW-LOGO-MINI]  134.26,73.39 0 bottom
LOGO50  SFE_LOGO_NAME.1_INCH  [SFE_LOGO_NAME_.1]  112.7,71.46 270 bottom
LOGO51  QWIIC_LOGO_4MM  [QWIIC_4MM]  112.78,75.9 0 top
LOGO52  OSHW-LOGOMINI  [OSHW-LOGO-MINI]  160.17,73.39 0 bottom
LOGO53  SFE_LOGO_NAME.1_INCH  [SFE_LOGO_NAME_.1]  138.61,71.46 270 bottom
LOGO54  QWIIC_LOGO_4MM  [QWIIC_4MM]  138.68,75.9 0 top
LOGO55  OSHW-LOGOMINI  [OSHW-LOGO-MINI]  30.63,99.29 0 bottom
LOGO56  SFE_LOGO_NAME.1_INCH  [SFE_LOGO_NAME_.1]  9.07,97.37 270 bottom
LOGO57  QWIIC_LOGO_4MM  [QWIIC_4MM]  9.14,101.8 0 top
LOGO58  OSHW-LOGOMINI  [OSHW-LOGO-MINI]  56.54,99.29 0 bottom
LOGO59  SFE_LOGO_NAME.1_INCH  [SFE_LOGO_NAME_.1]  34.98,97.37 270 bottom
LOGO60  QWIIC_LOGO_4MM  [QWIIC_4MM]  35.05,101.8 0 top
LOGO61  OSHW-LOGOMINI  [OSHW-LOGO-MINI]  82.45,99.29 0 bottom
LOGO62  SFE_LOGO_NAME.1_INCH  [SFE_LOGO_NAME_.1]  60.89,97.37 270 bottom
LOGO63  QWIIC_LOGO_4MM  [QWIIC_4MM]  60.96,101.8 0 top
LOGO64  OSHW-LOGOMINI  [OSHW-LOGO-MINI]  108.36,99.29 0 bottom
LOGO65  SFE_LOGO_NAME.1_INCH  [SFE_LOGO_NAME_.1]  86.79,97.37 270 bottom
LOGO66  QWIIC_LOGO_4MM  [QWIIC_4MM]  86.87,101.8 0 top
LOGO67  OSHW-LOGOMINI  [OSHW-LOGO-MINI]  134.26,99.29 0 bottom
LOGO68  SFE_LOGO_NAME.1_INCH  [SFE_LOGO_NAME_.1]  112.7,97.37 270 bottom
LOGO69  QWIIC_LOGO_4MM  [QWIIC_4MM]  112.78,101.8 0 top
LOGO70  OSHW-LOGOMINI  [OSHW-LOGO-MINI]  160.17,99.29 0 bottom
LOGO71  SFE_LOGO_NAME.1_INCH  [SFE_LOGO_NAME_.1]  138.61,97.37 270 bottom
LOGO72  QWIIC_LOGO_4MM  [QWIIC_4MM]  138.68,101.8 0 top
R1  2.2k  [0603]  19.81,12.49 0 top
R2  2.2k  [0603]  19.81,13.96 180 top
R3  100k  [0603]  15.04,16.76 90 top
R4  1k  [0603]  29.67,24.84 90 top
R5  100k  [0603]  26.57,15.88 0 top
R6  100k  [0603]  26.54,14.05 180 top
R7  100k  [0603]  19.68,27.56 270 top
R8  2.2k  [0603]  45.72,12.49 0 top
R9  2.2k  [0603]  45.72,13.96 180 top
R10  100k  [0603]  40.94,16.76 90 top
R11  1k  [0603]  55.58,24.84 90 top
R12  100k  [0603]  52.48,15.88 0 top
R13  100k  [0603]  52.45,14.05 180 top
R14  100k  [0603]  45.59,27.56 270 top
R15  2.2k  [0603]  71.63,12.49 0 top
R16  2.2k  [0603]  71.63,13.96 180 top
R17  100k  [0603]  66.85,16.76 90 top
R18  1k  [0603]  81.48,24.84 90 top
R19  100k  [0603]  78.38,15.88 0 top
R20  100k  [0603]  78.36,14.05 180 top
R21  100k  [0603]  71.5,27.56 270 top
R22  2.2k  [0603]  97.54,12.49 0 top
R23  2.2k  [0603]  97.54,13.96 180 top
R24  100k  [0603]  92.76,16.76 90 top
R25  1k  [0603]  107.39,24.84 90 top
R26  100k  [0603]  104.29,15.88 0 top
R27  100k  [0603]  104.27,14.05 180 top
R28  100k  [0603]  97.41,27.56 270 top
R29  2.2k  [0603]  123.44,12.49 0 top
R30  2.2k  [0603]  123.44,13.96 180 top
R31  100k  [0603]  118.67,16.76 90 top
R32  1k  [0603]  133.3,24.84 90 top
R33  100k  [0603]  130.2,15.88 0 top
R34  100k  [0603]  130.17,14.05 180 top
R35  100k  [0603]  123.32,27.56 270 top
R36  2.2k  [0603]  149.35,12.49 0 top
R37  2.2k  [0603]  149.35,13.96 180 top
R38  100k  [0603]  144.58,16.76 90 top
R39  1k  [0603]  159.21,24.84 90 top
R40  100k  [0603]  156.11,15.88 0 top
R41  100k  [0603]  156.08,14.05 180 top
R42  100k  [0603]  149.22,27.56 270 top
R43  2.2k  [0603]  19.81,38.4 0 top
R44  2.2k  [0603]  19.81,39.87 180 top
R45  100k  [0603]  15.04,42.67 90 top
R46  1k  [0603]  29.67,50.75 90 top
R47  100k  [0603]  26.57,41.78 0 top
R48  100k  [0603]  26.54,39.95 180 top
R49  100k  [0603]  19.68,53.47 270 top
R50  2.2k  [0603]  45.72,38.4 0 top
R51  2.2k  [0603]  45.72,39.87 180 top
R52  100k  [0603]  40.94,42.67 90 top
R53  1k  [0603]  55.58,50.75 90 top
R54  100k  [0603]  52.48,41.78 0 top
R55  100k  [0603]  52.45,39.95 180 top
R56  100k  [0603]  45.59,53.47 270 top
R57  2.2k  [0603]  71.63,38.4 0 top
R58  2.2k  [0603]  71.63,39.87 180 top
R59  100k  [0603]  66.85,42.67 90 top
R60  1k  [0603]  81.48,50.75 90 top
R61  100k  [0603]  78.38,41.78 0 top
R62  100k  [0603]  78.36,39.95 180 top
R63  100k  [0603]  71.5,53.47 270 top
R64  2.2k  [0603]  97.54,38.4 0 top
R65  2.2k  [0603]  97.54,39.87 180 top
R66  100k  [0603]  92.76,42.67 90 top
R67  1k  [0603]  107.39,50.75 90 top
R68  100k  [0603]  104.29,41.78 0 top
R69  100k  [0603]  104.27,39.95 180 top
R70  100k  [0603]  97.41,53.47 270 top
R71  2.2k  [0603]  123.44,38.4 0 top
R72  2.2k  [0603]  123.44,39.87 180 top
R73  100k  [0603]  118.67,42.67 90 top
R74  1k  [0603]  133.3,50.75 90 top
R75  100k  [0603]  130.2,41.78 0 top
R76  100k  [0603]  130.17,39.95 180 top
R77  100k  [0603]  123.32,53.47 270 top
R78  2.2k  [0603]  149.35,38.4 0 top
R79  2.2k  [0603]  149.35,39.87 180 top
R80  100k  [0603]  144.58,42.67 90 top
R81  1k  [0603]  159.21,50.75 90 top
R82  100k  [0603]  156.11,41.78 0 top
R83  100k  [0603]  156.08,39.95 180 top
R84  100k  [0603]  149.22,53.47 270 top
R85  2.2k  [0603]  19.81,64.31 0 top
R86  2.2k  [0603]  19.81,65.78 180 top
R87  100k  [0603]  15.04,68.57 90 top
R88  1k  [0603]  29.67,76.66 90 top
R89  100k  [0603]  26.57,67.69 0 top
R90  100k  [0603]  26.54,65.86 180 top
R91  100k  [0603]  19.68,79.38 270 top
R92  2.2k  [0603]  45.72,64.31 0 top
R93  2.2k  [0603]  45.72,65.78 180 top
R94  100k  [0603]  40.94,68.57 90 top
R95  1k  [0603]  55.58,76.66 90 top
R96  100k  [0603]  52.48,67.69 0 top
R97  100k  [0603]  52.45,65.86 180 top
R98  100k  [0603]  45.59,79.38 270 top
R99  2.2k  [0603]  71.63,64.31 0 top
R100  2.2k  [0603]  71.63,65.78 180 top
R101  100k  [0603]  66.85,68.57 90 top
R102  1k  [0603]  81.48,76.66 90 top
R103  100k  [0603]  78.38,67.69 0 top
R104  100k  [0603]  78.36,65.86 180 top
R105  100k  [0603]  71.5,79.38 270 top
R106  2.2k  [0603]  97.54,64.31 0 top
R107  2.2k  [0603]  97.54,65.78 180 top
R108  100k  [0603]  92.76,68.57 90 top
R109  1k  [0603]  107.39,76.66 90 top
R110  100k  [0603]  104.29,67.69 0 top
R111  100k  [0603]  104.27,65.86 180 top
R112  100k  [0603]  97.41,79.38 270 top
R113  2.2k  [0603]  123.44,64.31 0 top
R114  2.2k  [0603]  123.44,65.78 180 top
R115  100k  [0603]  118.67,68.57 90 top
R116  1k  [0603]  133.3,76.66 90 top
R117  100k  [0603]  130.2,67.69 0 top
R118  100k  [0603]  130.17,65.86 180 top
R119  100k  [0603]  123.32,79.38 270 top
R120  2.2k  [0603]  149.35,64.31 0 top
R121  2.2k  [0603]  149.35,65.78 180 top
R122  100k  [0603]  144.58,68.57 90 top
R123  1k  [0603]  159.21,76.66 90 top
R124  100k  [0603]  156.11,67.69 0 top
R125  100k  [0603]  156.08,65.86 180 top
R126  100k  [0603]  149.22,79.38 270 top
R127  2.2k  [0603]  19.81,90.21 0 top
R128  2.2k  [0603]  19.81,91.69 180 top
R129  100k  [0603]  15.04,94.48 90 top
R130  1k  [0603]  29.67,102.57 90 top
R131  100k  [0603]  26.57,93.6 0 top
R132  100k  [0603]  26.54,91.77 180 top
R133  100k  [0603]  19.68,105.28 270 top
R134  2.2k  [0603]  45.72,90.21 0 top
R135  2.2k  [0603]  45.72,91.69 180 top
R136  100k  [0603]  40.94,94.48 90 top
R137  1k  [0603]  55.58,102.57 90 top
R138  100k  [0603]  52.48,93.6 0 top
R139  100k  [0603]  52.45,91.77 180 top
R140  100k  [0603]  45.59,105.28 270 top
R141  2.2k  [0603]  71.63,90.21 0 top
R142  2.2k  [0603]  71.63,91.69 180 top
R143  100k  [0603]  66.85,94.48 90 top
R144  1k  [0603]  81.48,102.57 90 top
R145  100k  [0603]  78.38,93.6 0 top
R146  100k  [0603]  78.36,91.77 180 top
R147  100k  [0603]  71.5,105.28 270 top
R148  2.2k  [0603]  97.54,90.21 0 top
R149  2.2k  [0603]  97.54,91.69 180 top
R150  100k  [0603]  92.76,94.48 90 top
R151  1k  [0603]  107.39,102.57 90 top
R152  100k  [0603]  104.29,93.6 0 top
R153  100k  [0603]  104.27,91.77 180 top
R154  100k  [0603]  97.41,105.28 270 top
R155  2.2k  [0603]  123.44,90.21 0 top
R156  2.2k  [0603]  123.44,91.69 180 top
R157  100k  [0603]  118.67,94.48 90 top
R158  1k  [0603]  133.3,102.57 90 top
R159  100k  [0603]  130.2,93.6 0 top
R160  100k  [0603]  130.17,91.77 180 top
R161  100k  [0603]  123.32,105.28 270 top
R162  2.2k  [0603]  149.35,90.21 0 top
R163  2.2k  [0603]  149.35,91.69 180 top
R164  100k  [0603]  144.58,94.48 90 top
R165  1k  [0603]  159.21,102.57 90 top
R166  100k  [0603]  156.11,93.6 0 top
R167  100k  [0603]  156.08,91.77 180 top
R168  100k  [0603]  149.22,105.28 270 top
SCX  JUMPER-SMT_2_NC_TRACE_SILK  [SMT-JUMPER_2_NC_TRACE_SILK]  26.06,29.08 0 bottom
SCX1  JUMPER-SMT_2_NC_TRACE_SILK  [SMT-JUMPER_2_NC_TRACE_SILK]  51.97,29.08 0 bottom
SCX2  JUMPER-SMT_2_NC_TRACE_SILK  [SMT-JUMPER_2_NC_TRACE_SILK]  77.88,29.08 0 bottom
SCX3  JUMPER-SMT_2_NC_TRACE_SILK  [SMT-JUMPER_2_NC_TRACE_SILK]  103.78,29.08 0 bottom
SCX4  JUMPER-SMT_2_NC_TRACE_SILK  [SMT-JUMPER_2_NC_TRACE_SILK]  129.69,29.08 0 bottom
SCX5  JUMPER-SMT_2_NC_TRACE_SILK  [SMT-JUMPER_2_NC_TRACE_SILK]  155.6,29.08 0 bottom
SCX6  JUMPER-SMT_2_NC_TRACE_SILK  [SMT-JUMPER_2_NC_TRACE_SILK]  26.06,54.99 0 bottom
SCX7  JUMPER-SMT_2_NC_TRACE_SILK  [SMT-JUMPER_2_NC_TRACE_SILK]  51.97,54.99 0 bottom
SCX8  JUMPER-SMT_2_NC_TRACE_SILK  [SMT-JUMPER_2_NC_TRACE_SILK]  77.88,54.99 0 bottom
SCX9  JUMPER-SMT_2_NC_TRACE_SILK  [SMT-JUMPER_2_NC_TRACE_SILK]  103.78,54.99 0 bottom
SCX10  JUMPER-SMT_2_NC_TRACE_SILK  [SMT-JUMPER_2_NC_TRACE_SILK]  129.69,54.99 0 bottom
SCX11  JUMPER-SMT_2_NC_TRACE_SILK  [SMT-JUMPER_2_NC_TRACE_SILK]  155.6,54.99 0 bottom
SCX12  JUMPER-SMT_2_NC_TRACE_SILK  [SMT-JUMPER_2_NC_TRACE_SILK]  26.06,80.9 0 bottom
SCX13  JUMPER-SMT_2_NC_TRACE_SILK  [SMT-JUMPER_2_NC_TRACE_SILK]  51.97,80.9 0 bottom
SCX14  JUMPER-SMT_2_NC_TRACE_SILK  [SMT-JUMPER_2_NC_TRACE_SILK]  77.88,80.9 0 bottom
SCX15  JUMPER-SMT_2_NC_TRACE_SILK  [SMT-JUMPER_2_NC_TRACE_SILK]  103.78,80.9 0 bottom
SCX16  JUMPER-SMT_2_NC_TRACE_SILK  [SMT-JUMPER_2_NC_TRACE_SILK]  129.69,80.9 0 bottom
SCX17  JUMPER-SMT_2_NC_TRACE_SILK  [SMT-JUMPER_2_NC_TRACE_SILK]  155.6,80.9 0 bottom
SCX18  JUMPER-SMT_2_NC_TRACE_SILK  [SMT-JUMPER_2_NC_TRACE_SILK]  26.06,106.81 0 bottom
SCX19  JUMPER-SMT_2_NC_TRACE_SILK  [SMT-JUMPER_2_NC_TRACE_SILK]  51.97,106.81 0 bottom
SCX20  JUMPER-SMT_2_NC_TRACE_SILK  [SMT-JUMPER_2_NC_TRACE_SILK]  77.88,106.81 0 bottom
SCX21  JUMPER-SMT_2_NC_TRACE_SILK  [SMT-JUMPER_2_NC_TRACE_SILK]  103.78,106.81 0 bottom
SCX22  JUMPER-SMT_2_NC_TRACE_SILK  [SMT-JUMPER_2_NC_TRACE_SILK]  129.69,106.81 0 bottom
SCX23  JUMPER-SMT_2_NC_TRACE_SILK  [SMT-JUMPER_2_NC_TRACE_SILK]  155.6,106.81 0 bottom
SDX  JUMPER-SMT_2_NC_TRACE_SILK  [SMT-JUMPER_2_NC_TRACE_SILK]  23.32,29.06 180 bottom
SDX1  JUMPER-SMT_2_NC_TRACE_SILK  [SMT-JUMPER_2_NC_TRACE_SILK]  49.23,29.06 180 bottom
SDX2  JUMPER-SMT_2_NC_TRACE_SILK  [SMT-JUMPER_2_NC_TRACE_SILK]  75.13,29.06 180 bottom
SDX3  JUMPER-SMT_2_NC_TRACE_SILK  [SMT-JUMPER_2_NC_TRACE_SILK]  101.04,29.06 180 bottom
SDX4  JUMPER-SMT_2_NC_TRACE_SILK  [SMT-JUMPER_2_NC_TRACE_SILK]  126.95,29.06 180 bottom
SDX5  JUMPER-SMT_2_NC_TRACE_SILK  [SMT-JUMPER_2_NC_TRACE_SILK]  152.86,29.06 180 bottom
SDX6  JUMPER-SMT_2_NC_TRACE_SILK  [SMT-JUMPER_2_NC_TRACE_SILK]  23.32,54.97 180 bottom
SDX7  JUMPER-SMT_2_NC_TRACE_SILK  [SMT-JUMPER_2_NC_TRACE_SILK]  49.23,54.97 180 bottom
SDX8  JUMPER-SMT_2_NC_TRACE_SILK  [SMT-JUMPER_2_NC_TRACE_SILK]  75.13,54.97 180 bottom
SDX9  JUMPER-SMT_2_NC_TRACE_SILK  [SMT-JUMPER_2_NC_TRACE_SILK]  101.04,54.97 180 bottom
SDX10  JUMPER-SMT_2_NC_TRACE_SILK  [SMT-JUMPER_2_NC_TRACE_SILK]  126.95,54.97 180 bottom
SDX11  JUMPER-SMT_2_NC_TRACE_SILK  [SMT-JUMPER_2_NC_TRACE_SILK]  152.86,54.97 180 bottom
SDX12  JUMPER-SMT_2_NC_TRACE_SILK  [SMT-JUMPER_2_NC_TRACE_SILK]  23.32,80.87 180 bottom
SDX13  JUMPER-SMT_2_NC_TRACE_SILK  [SMT-JUMPER_2_NC_TRACE_SILK]  49.23,80.87 180 bottom
SDX14  JUMPER-SMT_2_NC_TRACE_SILK  [SMT-JUMPER_2_NC_TRACE_SILK]  75.13,80.87 180 bottom
SDX15  JUMPER-SMT_2_NC_TRACE_SILK  [SMT-JUMPER_2_NC_TRACE_SILK]  101.04,80.87 180 bottom
SDX16  JUMPER-SMT_2_NC_TRACE_SILK  [SMT-JUMPER_2_NC_TRACE_SILK]  126.95,80.87 180 bottom
SDX17  JUMPER-SMT_2_NC_TRACE_SILK  [SMT-JUMPER_2_NC_TRACE_SILK]  152.86,80.87 180 bottom
SDX18  JUMPER-SMT_2_NC_TRACE_SILK  [SMT-JUMPER_2_NC_TRACE_SILK]  23.32,106.78 180 bottom
SDX19  JUMPER-SMT_2_NC_TRACE_SILK  [SMT-JUMPER_2_NC_TRACE_SILK]  49.23,106.78 180 bottom
SDX20  JUMPER-SMT_2_NC_TRACE_SILK  [SMT-JUMPER_2_NC_TRACE_SILK]  75.13,106.78 180 bottom
SDX21  JUMPER-SMT_2_NC_TRACE_SILK  [SMT-JUMPER_2_NC_TRACE_SILK]  101.04,106.78 180 bottom
SDX22  JUMPER-SMT_2_NC_TRACE_SILK  [SMT-JUMPER_2_NC_TRACE_SILK]  126.95,106.78 180 bottom
SDX23  JUMPER-SMT_2_NC_TRACE_SILK  [SMT-JUMPER_2_NC_TRACE_SILK]  152.86,106.78 180 bottom
STANDOFF1  STAND-OFFTIGHT  [STAND-OFF-TIGHT]  9.4,29.72 0 top
STANDOFF2  STAND-OFFTIGHT  [STAND-OFF-TIGHT]  9.4,9.4 0 top
STANDOFF3  STAND-OFFTIGHT  [STAND-OFF-TIGHT]  29.72,9.4 0 top
STANDOFF4  STAND-OFFTIGHT  [STAND-OFF-TIGHT]  29.72,29.72 0 top
STANDOFF5  STAND-OFFTIGHT  [STAND-OFF-TIGHT]  35.31,29.72 0 top
STANDOFF6  STAND-OFFTIGHT  [STAND-OFF-TIGHT]  35.31,9.4 0 top
STANDOFF7  STAND-OFFTIGHT  [STAND-OFF-TIGHT]  55.63,9.4 0 top
STANDOFF8  STAND-OFFTIGHT  [STAND-OFF-TIGHT]  55.63,29.72 0 top
STANDOFF9  STAND-OFFTIGHT  [STAND-OFF-TIGHT]  61.21,29.72 0 top
STANDOFF10  STAND-OFFTIGHT  [STAND-OFF-TIGHT]  61.21,9.4 0 top
STANDOFF11  STAND-OFFTIGHT  [STAND-OFF-TIGHT]  81.53,9.4 0 top
STANDOFF12  STAND-OFFTIGHT  [STAND-OFF-TIGHT]  81.53,29.72 0 top
STANDOFF13  STAND-OFFTIGHT  [STAND-OFF-TIGHT]  87.12,29.72 0 top
STANDOFF14  STAND-OFFTIGHT  [STAND-OFF-TIGHT]  87.12,9.4 0 top
STANDOFF15  STAND-OFFTIGHT  [STAND-OFF-TIGHT]  107.44,9.4 0 top
STANDOFF16  STAND-OFFTIGHT  [STAND-OFF-TIGHT]  107.44,29.72 0 top
STANDOFF17  STAND-OFFTIGHT  [STAND-OFF-TIGHT]  113.03,29.72 0 top
STANDOFF18  STAND-OFFTIGHT  [STAND-OFF-TIGHT]  113.03,9.4 0 top
STANDOFF19  STAND-OFFTIGHT  [STAND-OFF-TIGHT]  133.35,9.4 0 top
STANDOFF20  STAND-OFFTIGHT  [STAND-OFF-TIGHT]  133.35,29.72 0 top
STANDOFF21  STAND-OFFTIGHT  [STAND-OFF-TIGHT]  138.94,29.72 0 top
STANDOFF22  STAND-OFFTIGHT  [STAND-OFF-TIGHT]  138.94,9.4 0 top
STANDOFF23  STAND-OFFTIGHT  [STAND-OFF-TIGHT]  159.26,9.4 0 top
STANDOFF24  STAND-OFFTIGHT  [STAND-OFF-TIGHT]  159.26,29.72 0 top
STANDOFF25  STAND-OFFTIGHT  [STAND-OFF-TIGHT]  9.4,55.63 0 top
STANDOFF26  STAND-OFFTIGHT  [STAND-OFF-TIGHT]  9.4,35.31 0 top
STANDOFF27  STAND-OFFTIGHT  [STAND-OFF-TIGHT]  29.72,35.31 0 top
STANDOFF28  STAND-OFFTIGHT  [STAND-OFF-TIGHT]  29.72,55.63 0 top
STANDOFF29  STAND-OFFTIGHT  [STAND-OFF-TIGHT]  35.31,55.63 0 top
STANDOFF30  STAND-OFFTIGHT  [STAND-OFF-TIGHT]  35.31,35.31 0 top
STANDOFF31  STAND-OFFTIGHT  [STAND-OFF-TIGHT]  55.63,35.31 0 top
STANDOFF32  STAND-OFFTIGHT  [STAND-OFF-TIGHT]  55.63,55.63 0 top
STANDOFF33  STAND-OFFTIGHT  [STAND-OFF-TIGHT]  61.21,55.63 0 top
STANDOFF34  STAND-OFFTIGHT  [STAND-OFF-TIGHT]  61.21,35.31 0 top
STANDOFF35  STAND-OFFTIGHT  [STAND-OFF-TIGHT]  81.53,35.31 0 top
STANDOFF36  STAND-OFFTIGHT  [STAND-OFF-TIGHT]  81.53,55.63 0 top
STANDOFF37  STAND-OFFTIGHT  [STAND-OFF-TIGHT]  87.12,55.63 0 top
STANDOFF38  STAND-OFFTIGHT  [STAND-OFF-TIGHT]  87.12,35.31 0 top
STANDOFF39  STAND-OFFTIGHT  [STAND-OFF-TIGHT]  107.44,35.31 0 top
STANDOFF40  STAND-OFFTIGHT  [STAND-OFF-TIGHT]  107.44,55.63 0 top
STANDOFF41  STAND-OFFTIGHT  [STAND-OFF-TIGHT]  113.03,55.63 0 top
STANDOFF42  STAND-OFFTIGHT  [STAND-OFF-TIGHT]  113.03,35.31 0 top
STANDOFF43  STAND-OFFTIGHT  [STAND-OFF-TIGHT]  133.35,35.31 0 top
STANDOFF44  STAND-OFFTIGHT  [STAND-OFF-TIGHT]  133.35,55.63 0 top
STANDOFF45  STAND-OFFTIGHT  [STAND-OFF-TIGHT]  138.94,55.63 0 top
STANDOFF46  STAND-OFFTIGHT  [STAND-OFF-TIGHT]  138.94,35.31 0 top
STANDOFF47  STAND-OFFTIGHT  [STAND-OFF-TIGHT]  159.26,35.31 0 top
STANDOFF48  STAND-OFFTIGHT  [STAND-OFF-TIGHT]  159.26,55.63 0 top
STANDOFF49  STAND-OFFTIGHT  [STAND-OFF-TIGHT]  9.4,81.53 0 top
STANDOFF50  STAND-OFFTIGHT  [STAND-OFF-TIGHT]  9.4,61.21 0 top
STANDOFF51  STAND-OFFTIGHT  [STAND-OFF-TIGHT]  29.72,61.21 0 top
STANDOFF52  STAND-OFFTIGHT  [STAND-OFF-TIGHT]  29.72,81.53 0 top
STANDOFF53  STAND-OFFTIGHT  [STAND-OFF-TIGHT]  35.31,81.53 0 top
STANDOFF54  STAND-OFFTIGHT  [STAND-OFF-TIGHT]  35.31,61.21 0 top
STANDOFF55  STAND-OFFTIGHT  [STAND-OFF-TIGHT]  55.63,61.21 0 top
STANDOFF56  STAND-OFFTIGHT  [STAND-OFF-TIGHT]  55.63,81.53 0 top
STANDOFF57  STAND-OFFTIGHT  [STAND-OFF-TIGHT]  61.21,81.53 0 top
STANDOFF58  STAND-OFFTIGHT  [STAND-OFF-TIGHT]  61.21,61.21 0 top
STANDOFF59  STAND-OFFTIGHT  [STAND-OFF-TIGHT]  81.53,61.21 0 top
STANDOFF60  STAND-OFFTIGHT  [STAND-OFF-TIGHT]  81.53,81.53 0 top
STANDOFF61  STAND-OFFTIGHT  [STAND-OFF-TIGHT]  87.12,81.53 0 top
STANDOFF62  STAND-OFFTIGHT  [STAND-OFF-TIGHT]  87.12,61.21 0 top
STANDOFF63  STAND-OFFTIGHT  [STAND-OFF-TIGHT]  107.44,61.21 0 top
STANDOFF64  STAND-OFFTIGHT  [STAND-OFF-TIGHT]  107.44,81.53 0 top
STANDOFF65  STAND-OFFTIGHT  [STAND-OFF-TIGHT]  113.03,81.53 0 top
STANDOFF66  STAND-OFFTIGHT  [STAND-OFF-TIGHT]  113.03,61.21 0 top
STANDOFF67  STAND-OFFTIGHT  [STAND-OFF-TIGHT]  133.35,61.21 0 top
STANDOFF68  STAND-OFFTIGHT  [STAND-OFF-TIGHT]  133.35,81.53 0 top
STANDOFF69  STAND-OFFTIGHT  [STAND-OFF-TIGHT]  138.94,81.53 0 top
STANDOFF70  STAND-OFFTIGHT  [STAND-OFF-TIGHT]  138.94,61.21 0 top
STANDOFF71  STAND-OFFTIGHT  [STAND-OFF-TIGHT]  159.26,61.21 0 top
STANDOFF72  STAND-OFFTIGHT  [STAND-OFF-TIGHT]  159.26,81.53 0 top
STANDOFF73  STAND-OFFTIGHT  [STAND-OFF-TIGHT]  9.4,107.44 0 top
STANDOFF74  STAND-OFFTIGHT  [STAND-OFF-TIGHT]  9.4,87.12 0 top
STANDOFF75  STAND-OFFTIGHT  [STAND-OFF-TIGHT]  29.72,87.12 0 top
STANDOFF76  STAND-OFFTIGHT  [STAND-OFF-TIGHT]  29.72,107.44 0 top
STANDOFF77  STAND-OFFTIGHT  [STAND-OFF-TIGHT]  35.31,107.44 0 top
STANDOFF78  STAND-OFFTIGHT  [STAND-OFF-TIGHT]  35.31,87.12 0 top
STANDOFF79  STAND-OFFTIGHT  [STAND-OFF-TIGHT]  55.63,87.12 0 top
STANDOFF80  STAND-OFFTIGHT  [STAND-OFF-TIGHT]  55.63,107.44 0 top
STANDOFF81  STAND-OFFTIGHT  [STAND-OFF-TIGHT]  61.21,107.44 0 top
STANDOFF82  STAND-OFFTIGHT  [STAND-OFF-TIGHT]  61.21,87.12 0 top
STANDOFF83  STAND-OFFTIGHT  [STAND-OFF-TIGHT]  81.53,87.12 0 top
STANDOFF84  STAND-OFFTIGHT  [STAND-OFF-TIGHT]  81.53,107.44 0 top
STANDOFF85  STAND-OFFTIGHT  [STAND-OFF-TIGHT]  87.12,107.44 0 top
STANDOFF86  STAND-OFFTIGHT  [STAND-OFF-TIGHT]  87.12,87.12 0 top
STANDOFF87  STAND-OFFTIGHT  [STAND-OFF-TIGHT]  107.44,87.12 0 top
STANDOFF88  STAND-OFFTIGHT  [STAND-OFF-TIGHT]  107.44,107.44 0 top
STANDOFF89  STAND-OFFTIGHT  [STAND-OFF-TIGHT]  113.03,107.44 0 top
STANDOFF90  STAND-OFFTIGHT  [STAND-OFF-TIGHT]  113.03,87.12 0 top
STANDOFF91  STAND-OFFTIGHT  [STAND-OFF-TIGHT]  133.35,87.12 0 top
STANDOFF92  STAND-OFFTIGHT  [STAND-OFF-TIGHT]  133.35,107.44 0 top
STANDOFF93  STAND-OFFTIGHT  [STAND-OFF-TIGHT]  138.94,107.44 0 top
STANDOFF94  STAND-OFFTIGHT  [STAND-OFF-TIGHT]  138.94,87.12 0 top
STANDOFF95  STAND-OFFTIGHT  [STAND-OFF-TIGHT]  159.26,87.12 0 top
STANDOFF96  STAND-OFFTIGHT  [STAND-OFF-TIGHT]  159.26,107.44 0 top
U1  ISM330DHCX  [LGA-14L]  19.56,16.76 180 top
U2  MMC5983MA_QFN16  [LGA-16-3X3MM-4X4PINS]  19.56,23.75 0 top
U3  ISM330DHCX  [LGA-14L]  45.47,16.76 180 top
U4  MMC5983MA_QFN16  [LGA-16-3X3MM-4X4PINS]  45.47,23.75 0 top
U5  ISM330DHCX  [LGA-14L]  71.37,16.76 180 top
U6  MMC5983MA_QFN16  [LGA-16-3X3MM-4X4PINS]  71.37,23.75 0 top
U7  ISM330DHCX  [LGA-14L]  97.28,16.76 180 top
U8  MMC5983MA_QFN16  [LGA-16-3X3MM-4X4PINS]  97.28,23.75 0 top
U9  ISM330DHCX  [LGA-14L]  123.19,16.76 180 top
U10  MMC5983MA_QFN16  [LGA-16-3X3MM-4X4PINS]  123.19,23.75 0 top
U11  ISM330DHCX  [LGA-14L]  149.1,16.76 180 top
U12  MMC5983MA_QFN16  [LGA-16-3X3MM-4X4PINS]  149.1,23.75 0 top
U13  ISM330DHCX  [LGA-14L]  19.56,42.67 180 top
U14  MMC5983MA_QFN16  [LGA-16-3X3MM-4X4PINS]  19.56,49.66 0 top
U15  ISM330DHCX  [LGA-14L]  45.47,42.67 180 top
U16  MMC5983MA_QFN16  [LGA-16-3X3MM-4X4PINS]  45.47,49.66 0 top
U17  ISM330DHCX  [LGA-14L]  71.37,42.67 180 top
U18  MMC5983MA_QFN16  [LGA-16-3X3MM-4X4PINS]  71.37,49.66 0 top
U19  ISM330DHCX  [LGA-14L]  97.28,42.67 180 top
U20  MMC5983MA_QFN16  [LGA-16-3X3MM-4X4PINS]  97.28,49.66 0 top
U21  ISM330DHCX  [LGA-14L]  123.19,42.67 180 top
U22  MMC5983MA_QFN16  [LGA-16-3X3MM-4X4PINS]  123.19,49.66 0 top
U23  ISM330DHCX  [LGA-14L]  149.1,42.67 180 top
U24  MMC5983MA_QFN16  [LGA-16-3X3MM-4X4PINS]  149.1,49.66 0 top
U25  ISM330DHCX  [LGA-14L]  19.56,68.58 180 top
U26  MMC5983MA_QFN16  [LGA-16-3X3MM-4X4PINS]  19.56,75.56 0 top
U27  ISM330DHCX  [LGA-14L]  45.47,68.58 180 top
U28  MMC5983MA_QFN16  [LGA-16-3X3MM-4X4PINS]  45.47,75.56 0 top
U29  ISM330DHCX  [LGA-14L]  71.37,68.58 180 top
U30  MMC5983MA_QFN16  [LGA-16-3X3MM-4X4PINS]  71.37,75.56 0 top
U31  ISM330DHCX  [LGA-14L]  97.28,68.58 180 top
U32  MMC5983MA_QFN16  [LGA-16-3X3MM-4X4PINS]  97.28,75.56 0 top
U33  ISM330DHCX  [LGA-14L]  123.19,68.58 180 top
U34  MMC5983MA_QFN16  [LGA-16-3X3MM-4X4PINS]  123.19,75.56 0 top
U35  ISM330DHCX  [LGA-14L]  149.1,68.58 180 top
U36  MMC5983MA_QFN16  [LGA-16-3X3MM-4X4PINS]  149.1,75.56 0 top
U37  ISM330DHCX  [LGA-14L]  19.56,94.49 180 top
U38  MMC5983MA_QFN16  [LGA-16-3X3MM-4X4PINS]  19.56,101.47 0 top
U39  ISM330DHCX  [LGA-14L]  45.47,94.49 180 top
U40  MMC5983MA_QFN16  [LGA-16-3X3MM-4X4PINS]  45.47,101.47 0 top
U41  ISM330DHCX  [LGA-14L]  71.37,94.49 180 top
U42  MMC5983MA_QFN16  [LGA-16-3X3MM-4X4PINS]  71.37,101.47 0 top
U43  ISM330DHCX  [LGA-14L]  97.28,94.49 180 top
U44  MMC5983MA_QFN16  [LGA-16-3X3MM-4X4PINS]  97.28,101.47 0 top
U45  ISM330DHCX  [LGA-14L]  123.19,94.49 180 top
U46  MMC5983MA_QFN16  [LGA-16-3X3MM-4X4PINS]  123.19,101.47 0 top
U47  ISM330DHCX  [LGA-14L]  149.1,94.49 180 top
U48  MMC5983MA_QFN16  [LGA-16-3X3MM-4X4PINS]  149.1,101.47 0 top
U$1  [#3V3#1]  15.75,10.82 90 top
U$2  [#GND#0]  13.23,10.85 90 top
U$3  [ISM330DHCX331]  11.94,14.73 0 top
U$4  [SDA14]  18.29,10.67 90 top
U$5  [SCL13]  20.83,10.54 90 top
U$6  [#POCI#11]  25.4,11.07 270 bottom
U$7  [ISM330DHCX331]  12.57,19.81 270 bottom
U$8  [#INT1#0]  13.21,28.19 90 top
U$9  [#INT2#3]  15.75,28.19 90 top
U$10  [#INT1#2]  13.21,28.19 270 bottom
U$11  [#INT2#2]  15.75,28.19 270 bottom
U$12  [#MINT#4]  18.29,27.94 270 bottom
U$13  [ACC#Z5985]  22.86,21.97 0 bottom
U$14  [MAG#Z5984]  22.86,18.03 0 bottom
U$15  [#3V3#1]  15.75,10.82 270 bottom
U$16  [#LED#11]  30.48,23.85 0 bottom
U$17  [#GND#0]  13.23,10.85 270 bottom
U$18  [#POCI#12]  25.91,11.07 90 top
U$19  [##MCS##5]  20.83,28.19 270 bottom
U$20  [#SDX#7]  23.37,26.16 270 bottom
U$21  [MMC5983MA24]  11.81,13.46 0 top
U$22  [#SCL#5]  20.85,10.67 270 bottom
U$23  [#SCX#8]  26.16,26.16 270 bottom